# Altium PCB STSPIN 4 IN 1 ESC.PcbDoc (part 1 of 2)
Units mm, origin at the board's own origin, x right, y up, seen from the top; angles counter-clockwise.
Board outline 46 x 52 mm, 4 copper layers (Top Layer, Layer 1, Layer 2, Bottom Layer), stack 0.603 mm thick; 147 components, 145 nets, 686 pads, 138 vias.
Unrouted connection lines stored in the file: 240.
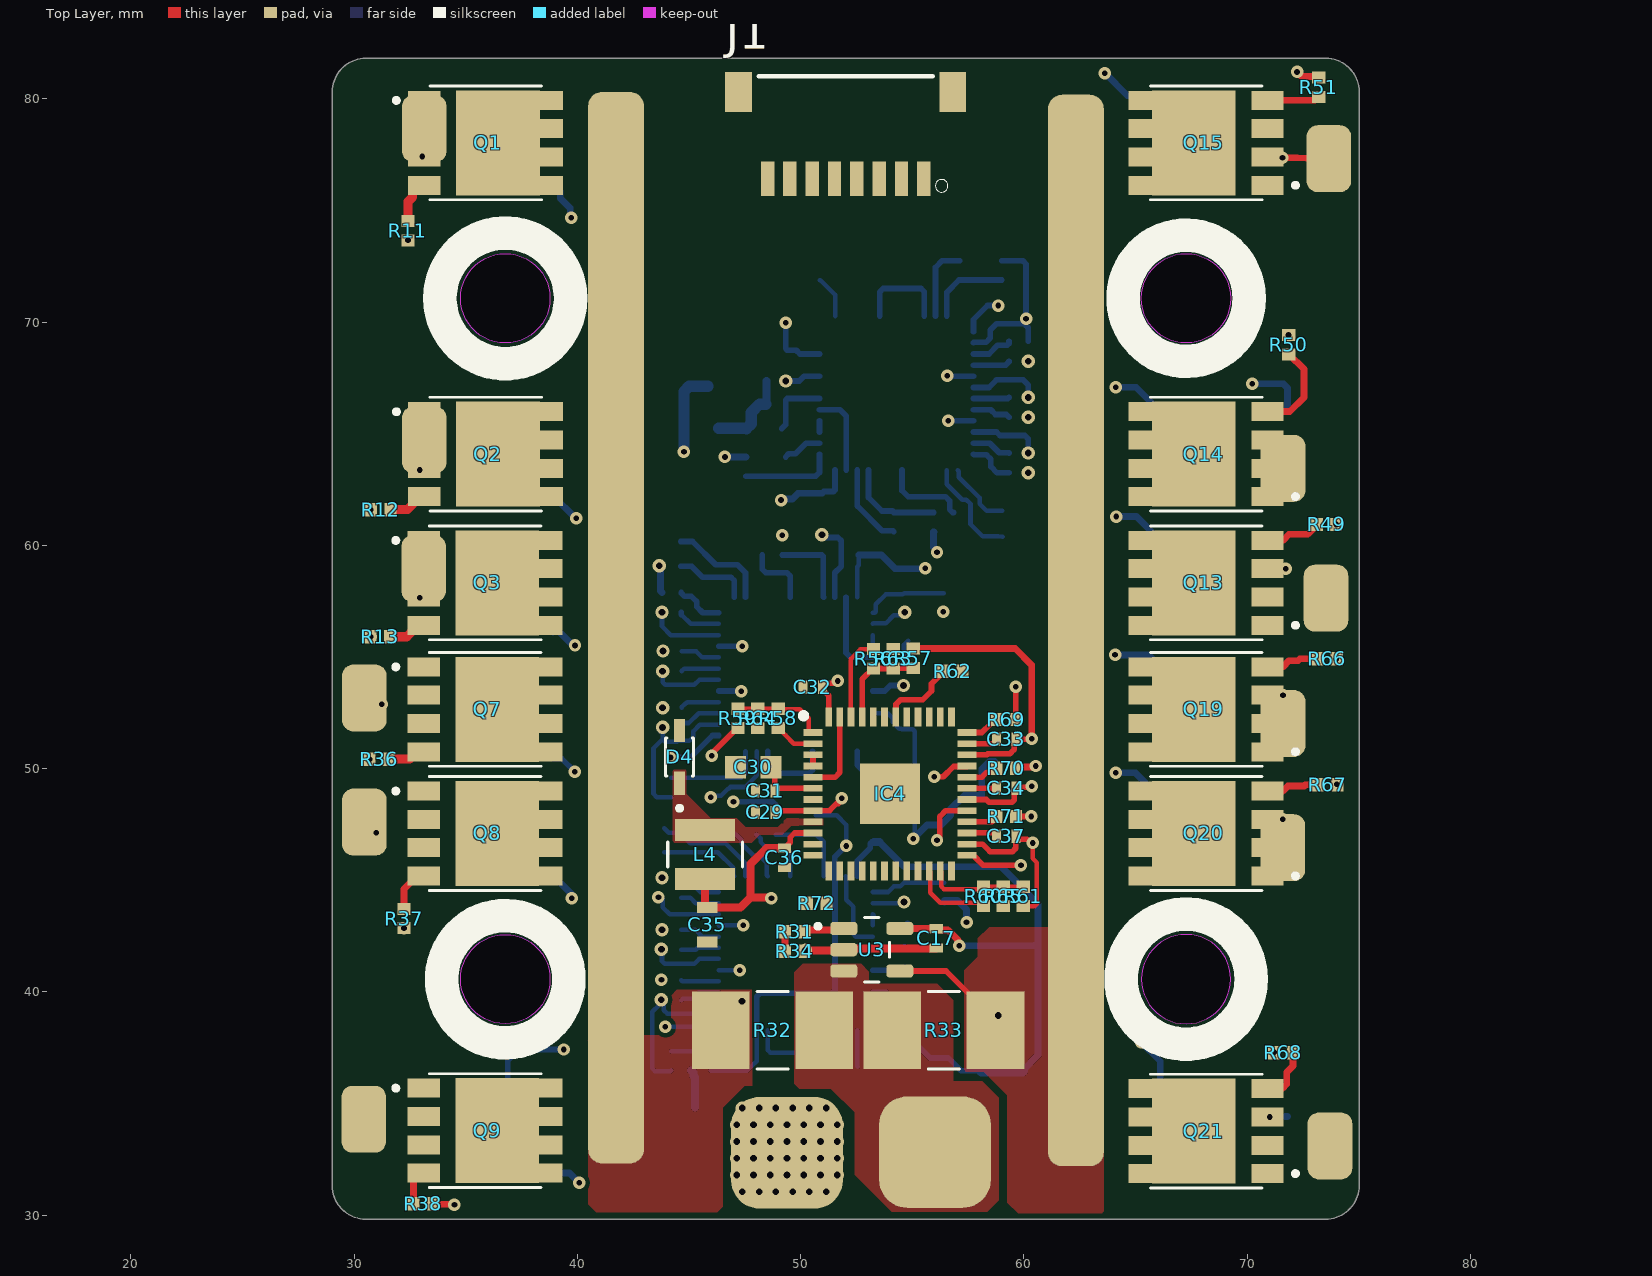
[diagram p0: Top Layer view]
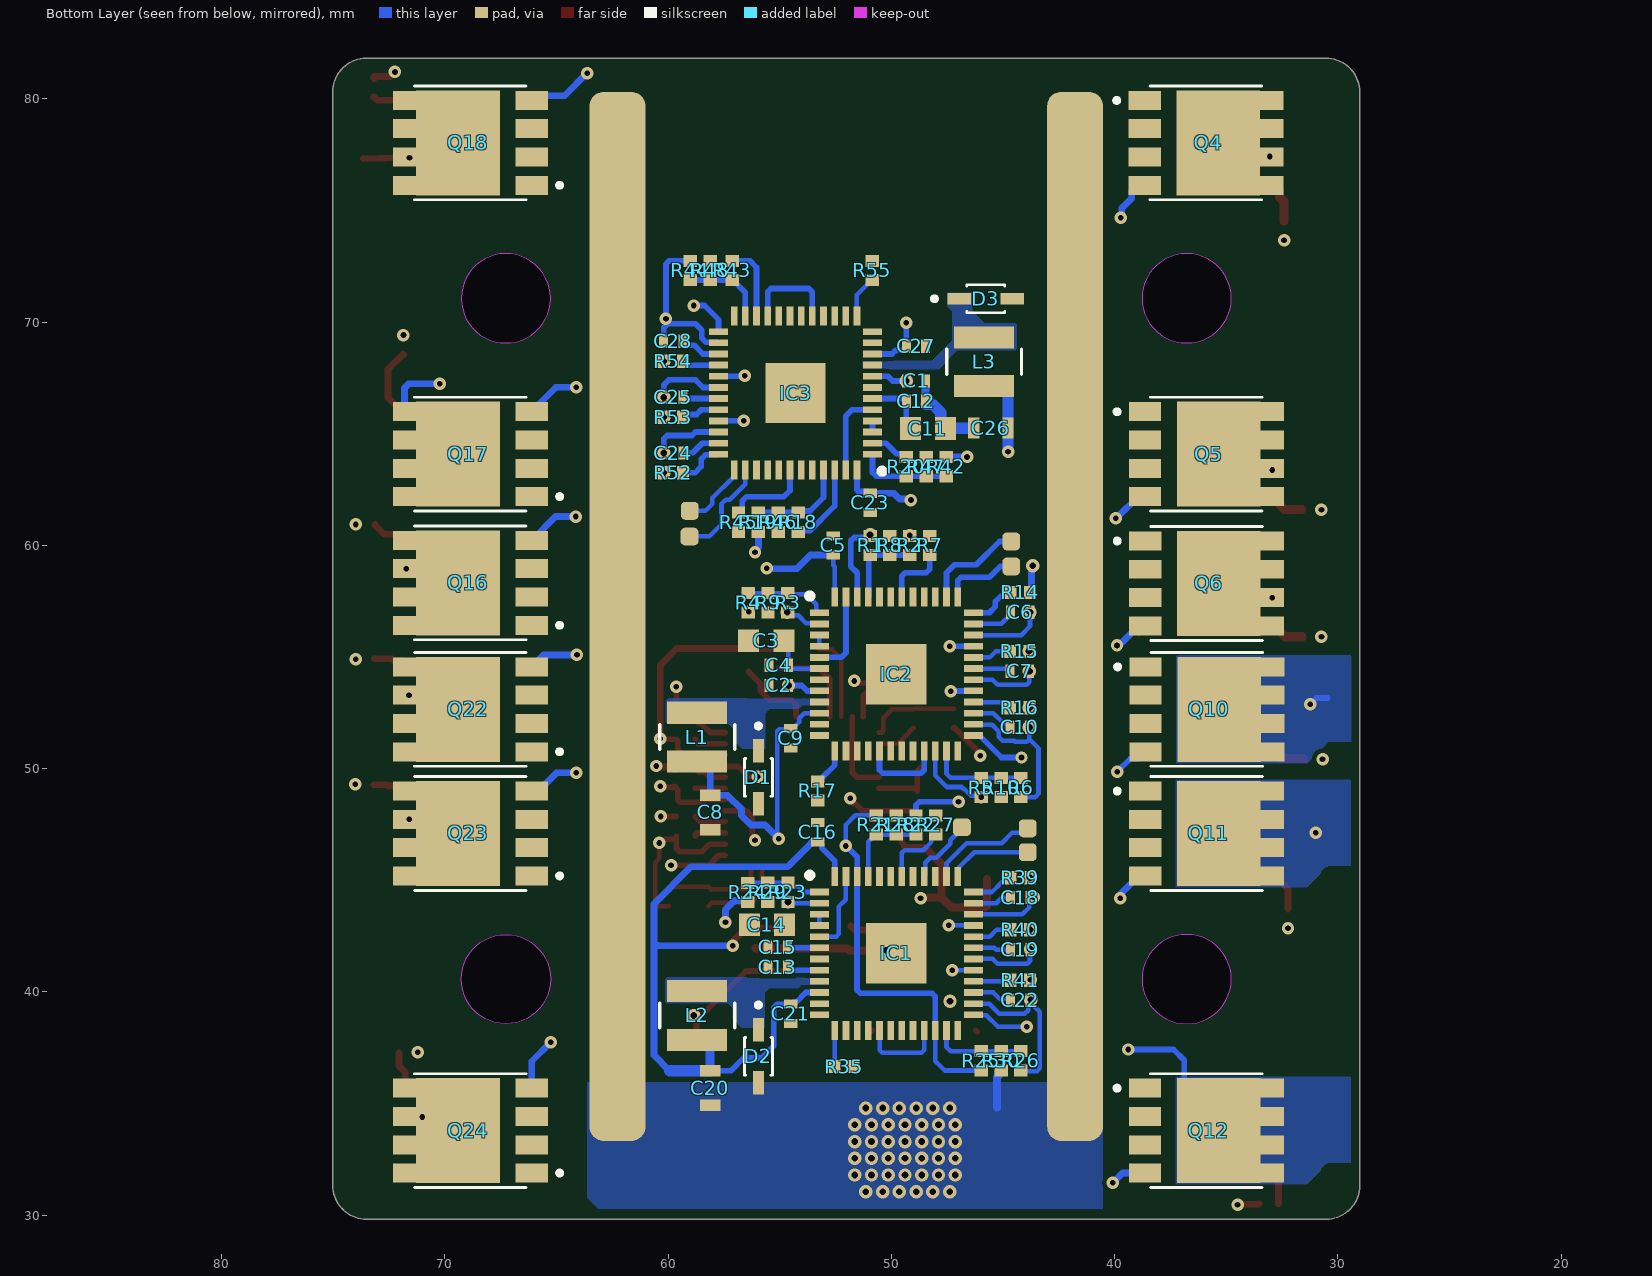
[diagram p1: Bottom Layer view, seen from below]
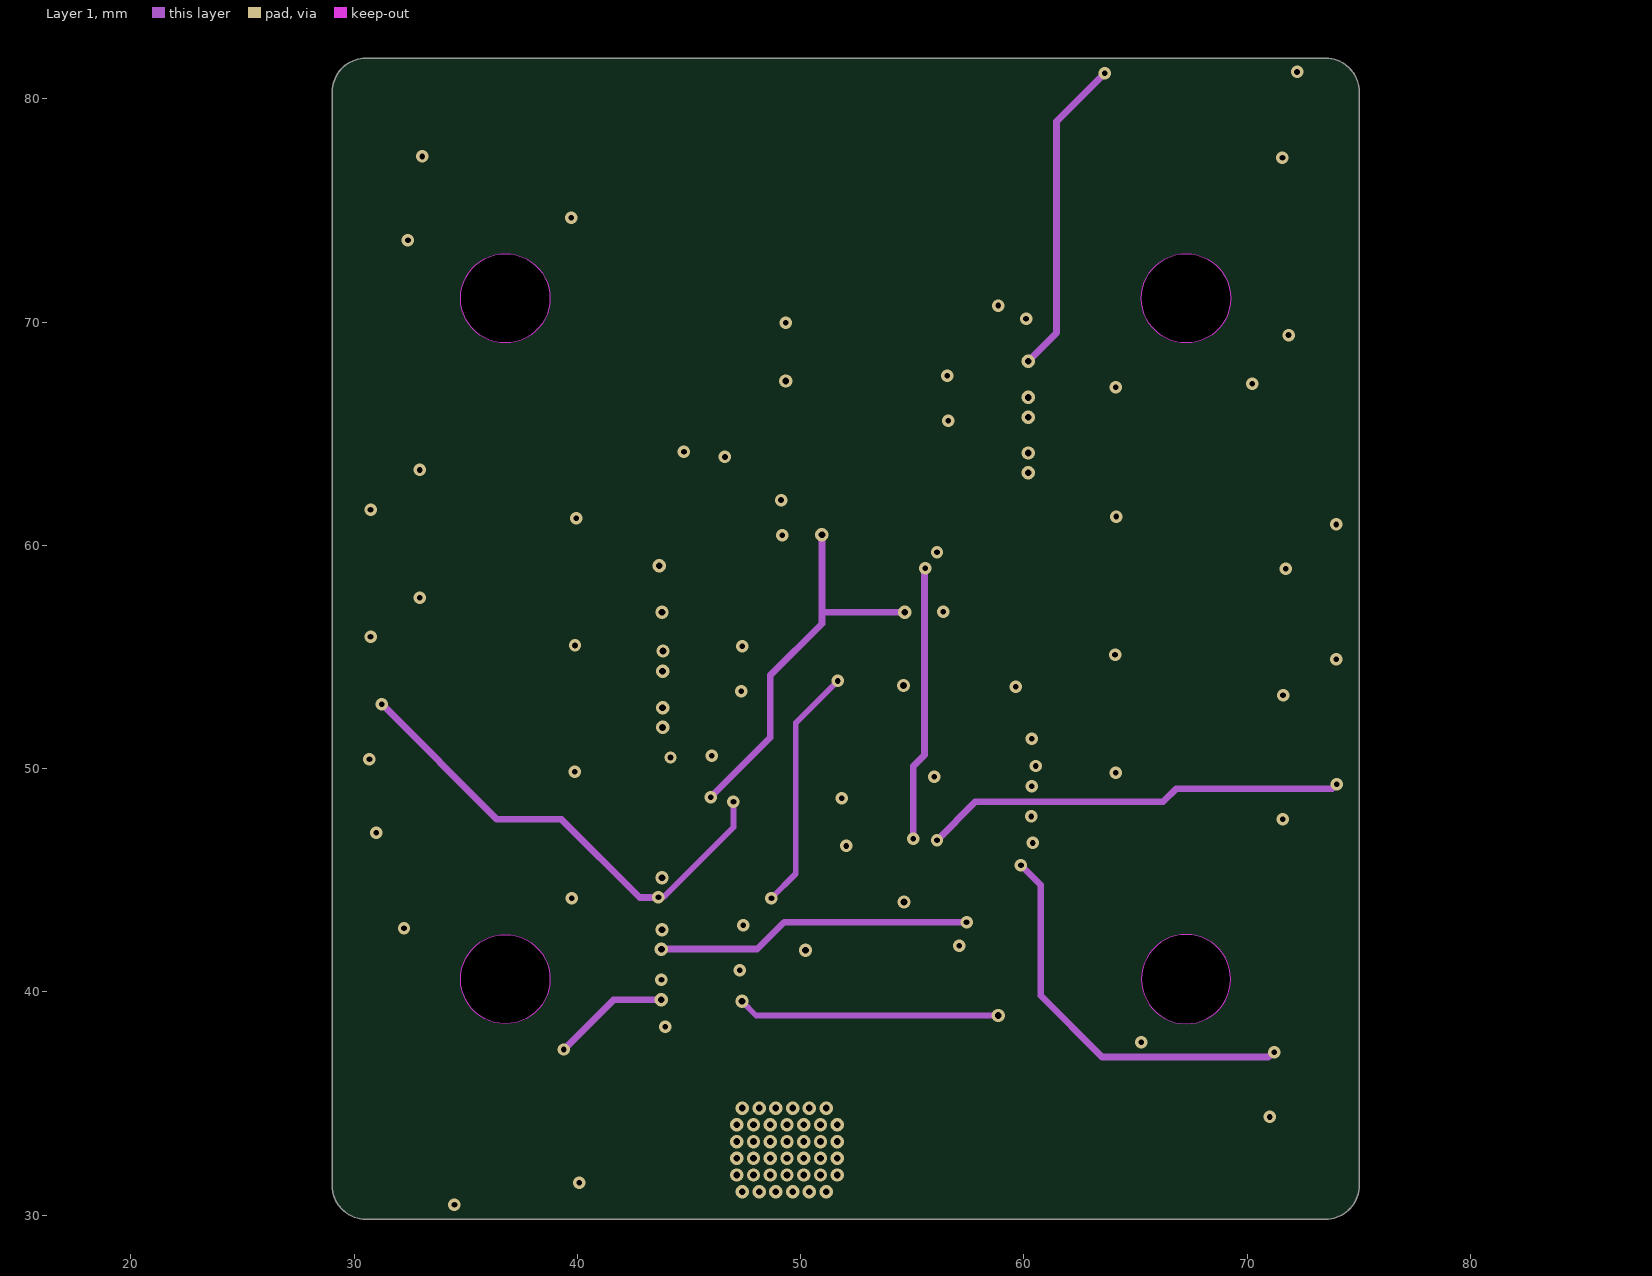
[diagram p2: Layer 1]
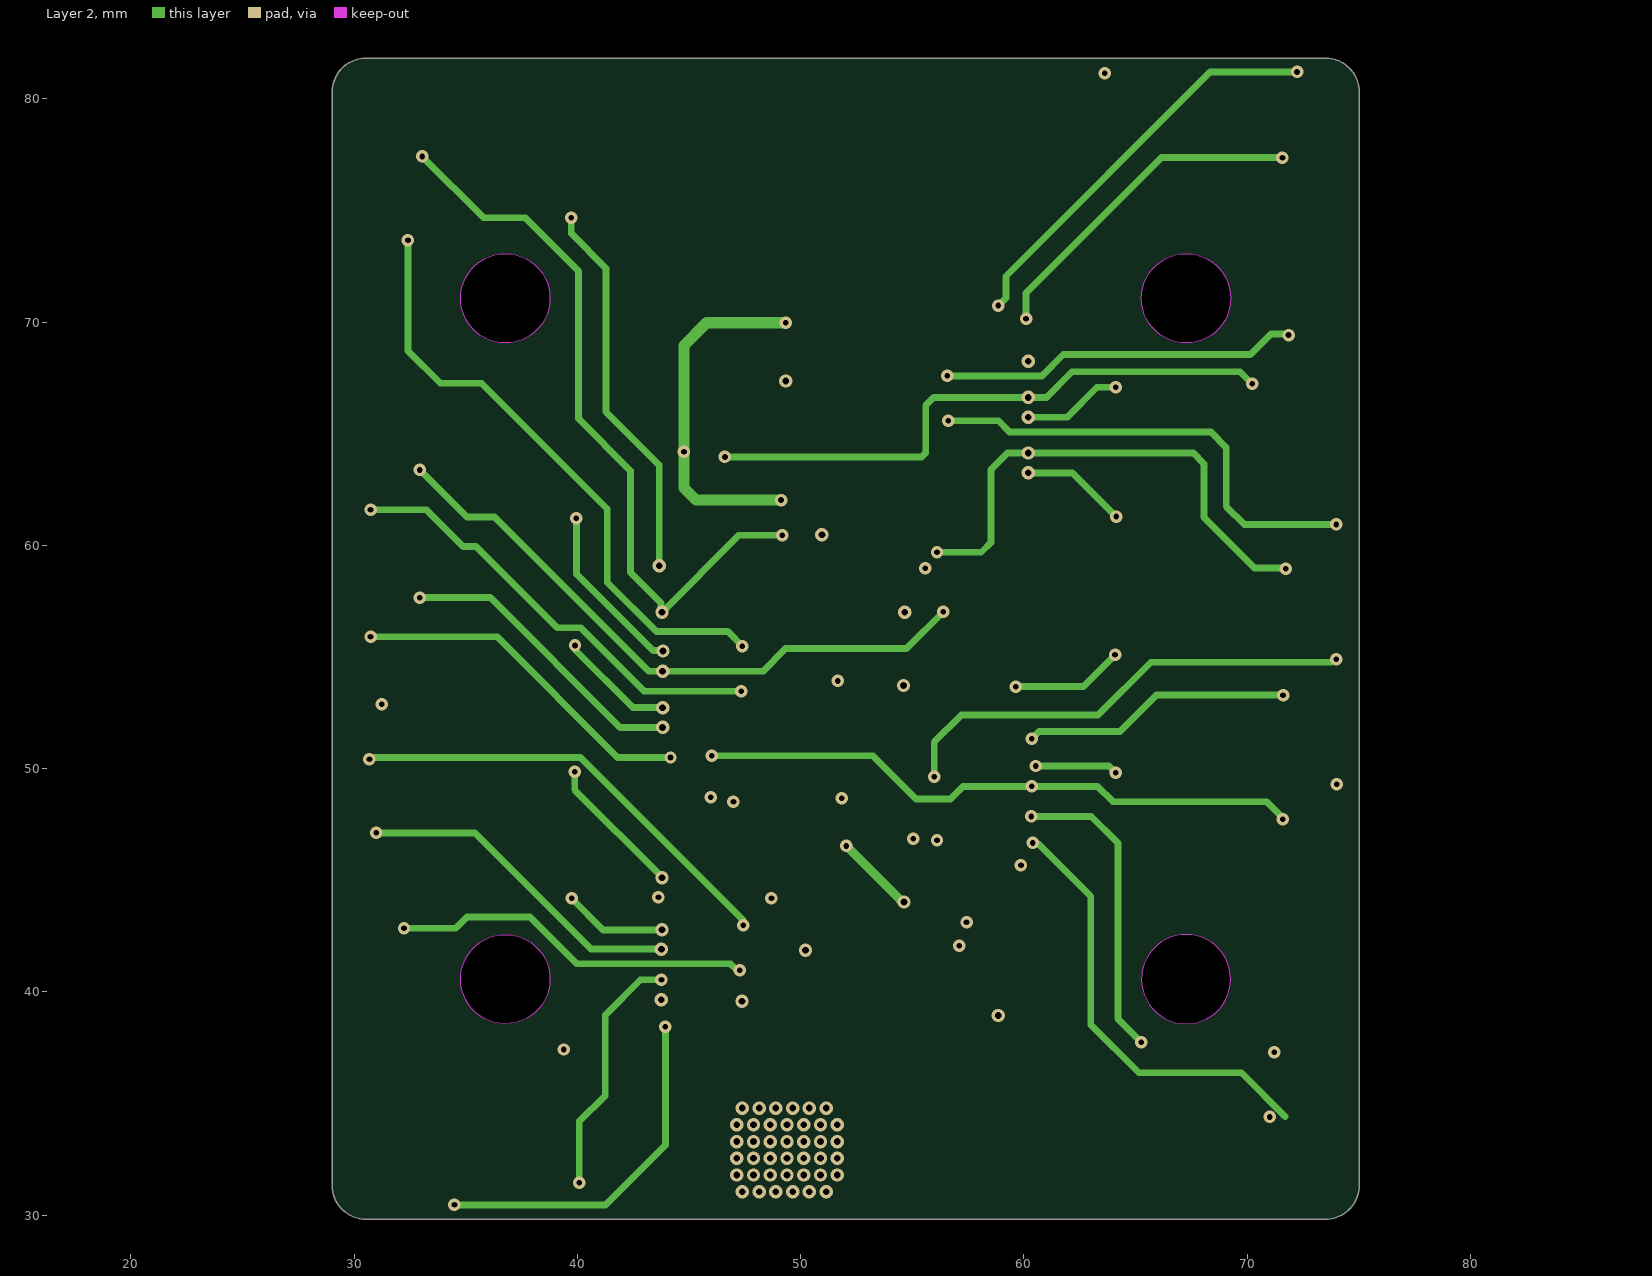
[diagram p3: Layer 2]
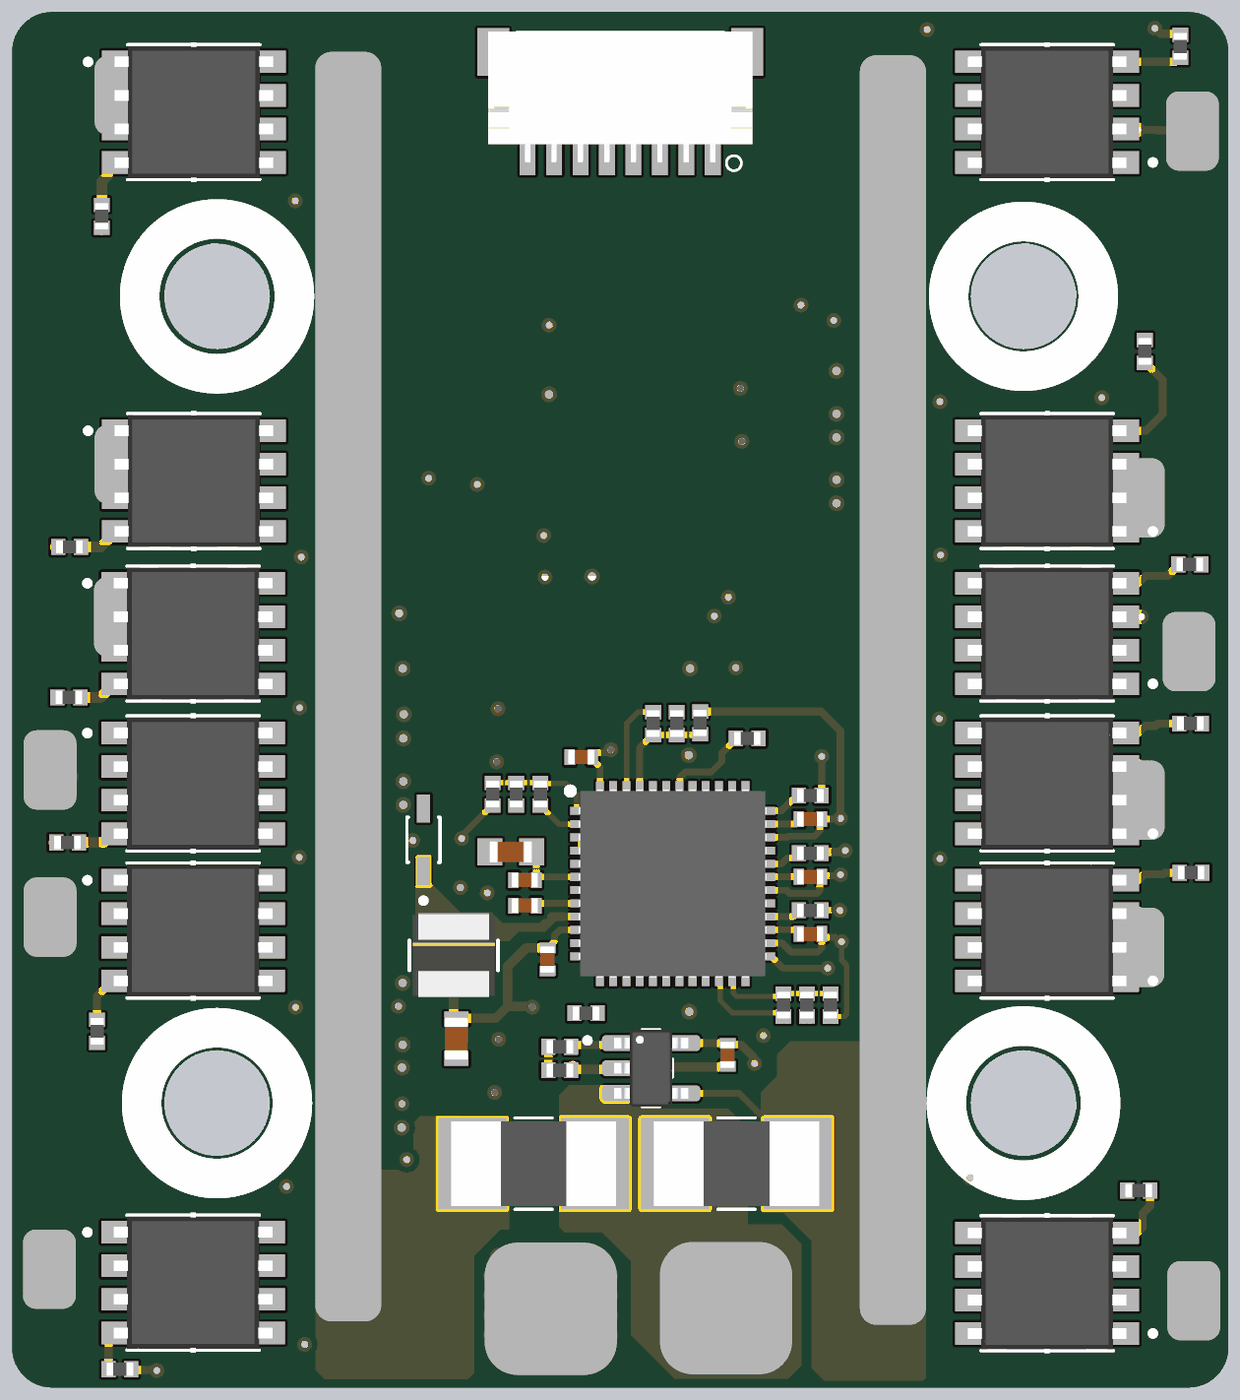
[diagram p4: 3D render of the assembled board from above, using the file's embedded part models]
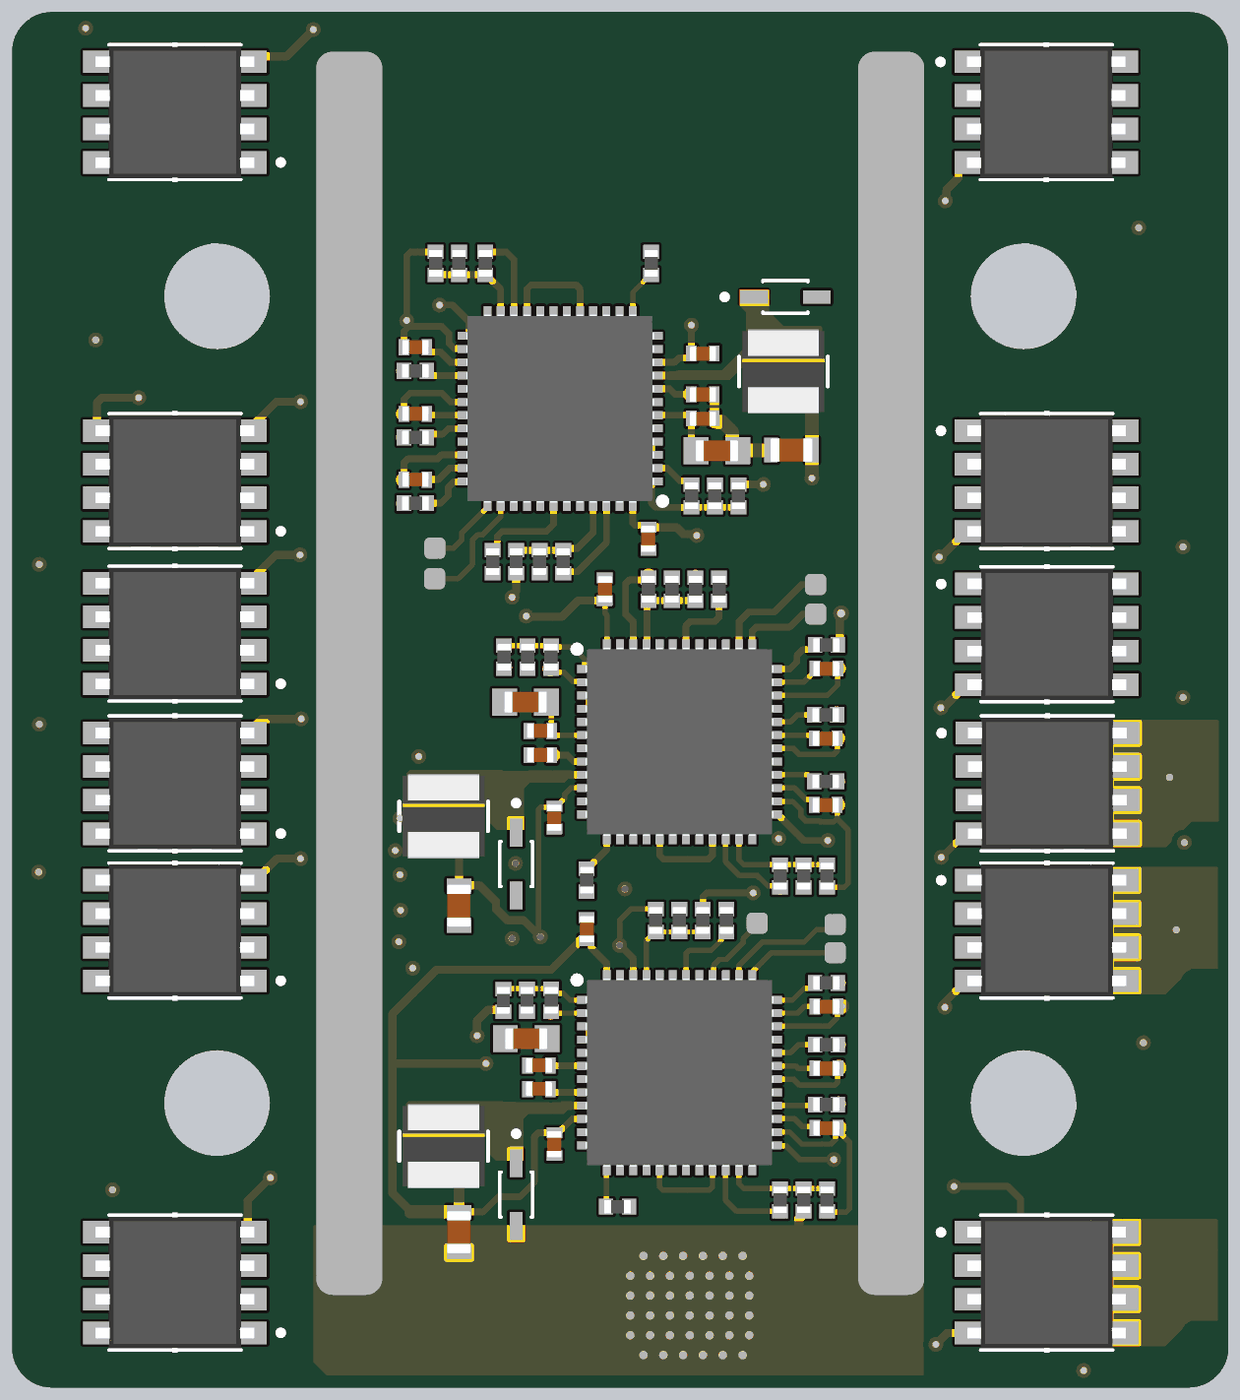
[diagram p5: 3D render of the assembled board from below, using the file's embedded part models]

## Layer stack, top to bottom
Top Solder: solder mask 0.0102, Solder Resist, Dk 3.5
Top Layer: signal copper 0.0356
Dielectric 2: prepreg 0.0711, PP-006, Dk 4.1
Layer 1: signal copper 0.035
Dielectric 1: dielectric 0.32, FR-4, Dk 4.8
Layer 2: signal copper 0.035
Dielectric 3: prepreg 0.0711, PP-006, Dk 4.1
Bottom Layer: signal copper 0.0356
Bottom Solder: solder mask 0.0102, Solder Resist, Dk 3.5

## Board outline
30.519,29.816 cw(c30.519,31.316) 29.019,31.316 29.019,80.316 cw(c30.519,80.316) 30.519,81.816 73.519,81.816 cw(c73.519,80.316) 75.019,80.316 75.019,31.316 cw(c73.519,31.316) 73.519,29.816
cut-out: 36.769,38.566 cw(c36.769,40.566) 34.769,40.566 cw(c36.769,40.566) 36.769,42.566 cw(c36.769,40.566) 38.769,40.566 cw(c36.769,40.566)
cut-out: 65.269,40.566 ccw(c67.269,40.566) 67.269,38.566 ccw(c67.269,40.566) 69.269,40.566 ccw(c67.269,40.566) 67.269,42.566 ccw(c67.269,40.566)
cut-out: 36.769,69.066 cw(c36.769,71.066) 34.769,71.066 cw(c36.769,71.066) 36.769,73.066 cw(c36.769,71.066) 38.769,71.066 cw(c36.769,71.066)
cut-out: 67.269,69.066 cw(c67.269,71.066) 65.269,71.066 cw(c67.269,71.066) 67.269,73.066 cw(c67.269,71.066) 69.269,71.066 cw(c67.269,71.066)

## Design rules (kind name [scope] priority, off if disabled: settings)
Clearance [All] p1: gap=0.203 ignorepadtopadclearanceinfootprint=TRUE
PlaneClearance [All] p1: clearance=0.254
PlaneConnect [All] p1: planeconnectstyle=Direct reliefexpansion=0.508 reliefentries=4 reliefconductorwidth=0.254 reliefairgap=0.254
PolygonConnect [All] p1: connectstyle=Direct reliefconductorwidth=0.254 reliefentries=4 polygonreliefangle="90 Angle" airgapwidth=0.254
RoutingVias [All] p1: holewidth=0.3 width=0.6 viastyle="Through Hole" minholewidth=0.2 minwidth=0.4 maxholewidth=6.2 maxwidth=8
SolderMaskExpansion [All] p1: expansion=0.102 istentingtop=FALSE
Width [All] p1: maxlimit=10.16 minlimit=0.203 preferedwidth=0.254
28 further rules are at their usual default settings.

## Classes and differential pairs
component class "STSPIN32F0A ESC5": C29 C30 C31 C32 C33 C34 C35 C36 C37 D4 IC4 L4 Q19 Q20 Q21 Q22 Q23 Q24 R56 R57 R58 R59 R60 R61 R62 R63 R64 R65 R66 R67 R68 R69 R70 R71 R72
component class "STSPIN32F0A ESC4": C1 C11 C12 C23 C24 C25 C26 C27 C28 D3 IC3 L3 Q13 Q14 Q15 Q16 Q17 Q18 R18 R19 R20 R42 R43 R44 R45 R46 R47 R48 R49 R50 R51 R52 R53 R54 R55
component class "STSPIN32F0A ESC3": C2 C3 C4 C5 C6 C7 C8 C9 C10 D1 IC2 J1 L1 Q1 Q2 Q3 Q4 Q5 Q6 R1 R2 R3 R4 R5 R6 R7 R8 R9 R10 R11 R12 R13 R14 R15 R16 R17
component class "STSPIN32F0A ESC2": C13 C14 C15 C16 C17 C18 C19 C20 C21 C22 D2 IC1 L2 Q7 Q8 Q9 Q10 Q11 Q12 R21 R22 R23 R24 R25 R26 R27 R28 R29 R30 R31 R32 R33 R34 R35 R36 R37 R38 R39 R40 R41 U3

## Components (designator, comment, footprint, x,y, rotation, side; value= is the part's Value field where it differs from the comment)
C1 "0.1uF" CAPC1005X55N 48.895,67.361 r0 bottom
C2 "0.1uF" CAPC1005X55N 55.042,53.721 r180 bottom
C3 "10uF" CAPC1608X100N 55.601,55.728 r180 bottom
C4 "0.1uF" CAPC1005X55N 55.042,54.635 r180 bottom
C5 "0.1uF" CAPC1005X55N 52.603,59.995 r270 bottom
C6 "680nF" CAPC1005X55N 44.221,56.998 r0 bottom
C7 "680nF" CAPC1005X55N 44.247,54.356 r0 bottom
C8 "47uF" CAPC1608X90N 58.115,48.031 r90 bottom
C9 "0.1uF" CAPC1005X55N 54.508,51.359 r90 bottom
C10 "680nF" CAPC1005X55N 44.247,51.841 r0 bottom
C11 "10uF" CAPC1608X100N 48.362,65.227 r0 bottom
C12 "0.1uF" CAPC1005X55N 48.895,66.446 r0 bottom
C13 "0.1uF" CAPC1005X55N 55.093,41.097 r180 bottom
C14 "10uF" CAPC1608X100N 55.575,43.002 r180 bottom
C15 "0.1uF" CAPC1005X55N 55.093,41.986 r180 bottom
C16 "0.1uF" CAPC1005X55N 53.289,47.142 r270 bottom
C17 "0.1uF" CAPC1005X55N 56.083,42.393 r90 top
C18 "680nF" CAPC1005X55N 44.221,44.221 r0 bottom
C19 "680nF" CAPC1005X55N 44.221,41.885 r0 bottom
C20 "47uF" CAPC1608X90N 58.115,35.687 r90 bottom
C21 "0.1uF" CAPC1005X55N 54.508,39.014 r90 bottom
C22 "680nF" CAPC1005X55N 44.221,39.624 r0 bottom
C23 "0.1uF" CAPC1005X55N 50.952,61.9 r90 bottom
C24 "680nF" CAPC1005X55N 59.766,64.135 r180 bottom
C25 "680nF" CAPC1005X55N 59.766,66.624 r180 bottom
C26 "47uF" CAPC1608X90N 45.542,65.253 r180 bottom
C27 "0.1uF" CAPC1005X55N 48.895,68.91 r0 bottom
C28 "680nF" CAPC1005X55N 59.766,69.139 r180 bottom
C29 "0.1uF" CAPC1005X55N 48.412,48.031 r0 top
C30 "10uF" CAPC1608X100N 47.879,50.063 r0 top
C31 "0.1uF" CAPC1005X55N 48.412,48.997 r0 top
C32 "0.1uF" CAPC1005X55N 50.546,53.645 r0 top
C33 "680nF" CAPC1005X55N 59.207,51.308 r180 top
C34 "680nF" CAPC1005X55N 59.207,49.124 r180 top
C35 "47uF" CAPC1608X90N 45.822,43.002 r90 top
C36 "0.1uF" CAPC1005X55N 49.276,45.999 r90 top
C37 "680nF" CAPC1005X55N 59.207,46.965 r180 top
D1 "B5819WS-TP" SOD2512X115N 55.956,49.606 r270 bottom
D2 "B5819WS-TP" SOD2512X115N 55.956,37.109 r270 bottom
D3 "B5819WS-TP" SOD2512X115N 45.771,71.044 r180 bottom
D4 "B5819WS-TP" SOD2512X115N 44.577,50.521 r90 top
IC1 "STSPIN32F0ATR" QFN50P700X700X100-49N-D 49.78,41.72 r180 bottom
IC2 "STSPIN32F0ATR" QFN50P700X700X100-49N-D 49.78,54.229 r180 bottom
IC3 "STSPIN32F0ATR" QFN50P700X700X100-49N-D 54.292,66.823 r0 bottom
IC4 "STSPIN32F0ATR" QFN50P700X700X100-49N-D 54.004,48.865 r0 top
J1 "SM08B-SRSS-TB(LF)(SN)" JST_SM08B-SRSS-TB(LF)(SN) 52.018,81.204 r180 top locked
L1 "22uH" IND_BOURNS_SRN3015 58.699,51.41 r270 bottom
L2 "22uH" IND_BOURNS_SRN3015 58.699,38.938 r270 bottom
L3 "22uH" IND_BOURNS_SRN3015 45.847,68.224 r270 bottom
L4 "22uH" IND_BOURNS_SRN3015 45.72,46.152 r270 top
Q1 "TPHR8504PL,L1Q" TRANS_TPHR8504PL,L1Q 35.89,78.029 r0 top
Q2 "TPHR8504PL,L1Q" TRANS_TPHR8504PL,L1Q 35.89,64.084 r0 top
Q3 "TPHR8504PL,L1Q" TRANS_TPHR8504PL,L1Q 35.865,58.318 r0 top
Q4 "TPHR8504PL,L1Q" TRANS_TPHR8504PL,L1Q 35.907,78.029 r180 bottom
Q5 "TPHR8504PL,L1Q" TRANS_TPHR8504PL,L1Q 35.89,64.084 r180 bottom
Q6 "TPHR8504PL,L1Q" TRANS_TPHR8504PL,L1Q 35.881,58.293 r180 bottom
Q7 "TPHR8504PL,L1Q" TRANS_TPHR8504PL,L1Q 35.865,52.654 r0 top
Q8 "TPHR8504PL,L1Q" TRANS_TPHR8504PL,L1Q 35.865,47.092 r0 top
Q9 "TPHR8504PL,L1Q" TRANS_TPHR8504PL,L1Q 35.865,33.782 r0 top
Q10 "TPHR8504PL,L1Q" TRANS_TPHR8504PL,L1Q 35.865,52.654 r180 bottom
Q11 "TPHR8504PL,L1Q" TRANS_TPHR8504PL,L1Q 35.881,47.092 r180 bottom
Q12 "TPHR8504PL,L1Q" TRANS_TPHR8504PL,L1Q 35.89,33.782 r180 bottom
Q13 "TPHR8504PL,L1Q" TRANS_TPHR8504PL,L1Q 68.165,58.318 r180 top
Q14 "TPHR8504PL,L1Q" TRANS_TPHR8504PL,L1Q 68.165,64.084 r180 top
Q15 "TPHR8504PL,L1Q" TRANS_TPHR8504PL,L1Q 68.165,78.029 r180 top
Q16 "TPHR8504PL,L1Q" TRANS_TPHR8504PL,L1Q 68.859,58.318 r0 bottom
Q17 "TPHR8504PL,L1Q" TRANS_TPHR8504PL,L1Q 68.859,64.084 r0 bottom
Q18 "TPHR8504PL,L1Q" TRANS_TPHR8504PL,L1Q 68.859,78.029 r0 bottom
Q19 "TPHR8504PL,L1Q" TRANS_TPHR8504PL,L1Q 68.165,52.654 r180 top
Q20 "TPHR8504PL,L1Q" TRANS_TPHR8504PL,L1Q 68.165,47.092 r180 top
Q21 "TPHR8504PL,L1Q" TRANS_TPHR8504PL,L1Q 68.165,33.757 r180 top
Q22 "TPHR8504PL,L1Q" TRANS_TPHR8504PL,L1Q 68.859,52.654 r0 bottom
Q23 "TPHR8504PL,L1Q" TRANS_TPHR8504PL,L1Q 68.859,47.092 r0 bottom
Q24 "TPHR8504PL,L1Q" TRANS_TPHR8504PL,L1Q 68.859,33.782 r0 bottom
R1 "10K" RESC1005X37N 50.952,59.995 r90 bottom
R2 "10K" RESC1005X37N 49.174,59.995 r270 bottom
R3 "10K" RESC1005X37N 54.635,57.429 r270 bottom
R4 "10K" RESC1005X37N 56.413,57.429 r90 bottom
R5 "10K" RESC1005X37N 45.974,49.149 r270 bottom
R6 "10K" RESC1005X37N 44.196,49.149 r90 bottom
R7 "10K" RESC1005X37N 48.285,59.995 r270 bottom
R8 "1K" RESC1005X37N 50.063,59.995 r90 bottom
R9 "1K" RESC1005X37N 55.524,57.429 r270 bottom
R10 "1K" RESC1005X37N 45.085,49.149 r270 bottom
R11 "22R" RESC1005X37N 32.41,74.092 r270 top
R12 "22R" RESC1005X37N 31.191,61.595 r180 top
R13 "22R" RESC1005X37N 31.166,55.905 r180 top
R14 "22R" RESC1005X37N 44.221,57.887 r0 bottom
R15 "22R" RESC1005X37N 44.247,55.245 r0 bottom
R16 "22R" RESC1005X37N 44.247,52.73 r0 bottom
R17 "1K" RESC1005X37N 53.289,48.997 r90 bottom
R18 "10K" RESC1005X37N 54.178,61.036 r270 bottom
R19 "10K" RESC1005X37N 55.956,61.036 r90 bottom
R20 "10K" RESC1005X37N 49.327,63.525 r90 bottom
R21 "10K" RESC1005X37N 50.673,47.473 r90 bottom
R22 "10K" RESC1005X37N 48.895,47.473 r270 bottom
R23 "10K" RESC1005X37N 54.63,44.454 r270 bottom
R24 "10K" RESC1005X37N 56.439,44.45 r90 bottom
R25 "10K" RESC1005X37N 45.974,36.906 r270 bottom
R26 "10K" RESC1005X37N 44.196,36.906 r90 bottom
R27 "10K" RESC1005X37N 48.006,47.473 r270 bottom
R28 "1K" RESC1005X37N 49.784,47.473 r90 bottom
R29 "1K" RESC1005X37N 55.545,44.454 r270 bottom
R30 "1K" RESC1005X37N 45.085,36.906 r270 bottom
R31 "1K" RESC1005X37N 49.733,42.697 r180 top
R32 "CSSH2512JTL500" RESC6232X104N 48.743,38.278 r180 top
R33 "CSSH2512JTL500" RESC6232X104N 56.413,38.278 r0 top
R34 "1K" RESC1005X37N 49.733,41.808 r0 top
R35 "1K" RESC1005X37N 52.121,36.652 r0 bottom
R36 "22R" RESC1005X37N 31.115,50.419 r180 top
R37 "22R" RESC1005X37N 32.233,43.282 r270 top
R38 "22R" RESC1005X37N 33.096,30.505 r0 top
R39 "22R" RESC1005X37N 44.221,45.11 r0 bottom
R40 "22R" RESC1005X37N 44.221,42.774 r0 bottom
R41 "22R" RESC1005X37N 44.221,40.513 r0 bottom
R42 "10K" RESC1005X37N 47.549,63.525 r270 bottom
R43 "10K" RESC1005X37N 57.125,72.314 r90 bottom
R44 "10K" RESC1005X37N 59.004,72.314 r270 bottom
R45 "10K" RESC1005X37N 56.845,61.036 r90 bottom
R46 "1K" RESC1005X37N 55.067,61.036 r270 bottom
R47 "1K" RESC1005X37N 48.438,63.525 r90 bottom
R48 "1K" RESC1005X37N 58.115,72.314 r90 bottom
R49 "22R" RESC1005X37N 73.558,60.935 r0 top
R50 "22R" RESC1005X37N 71.857,68.986 r90 top
R51 "22R" RESC1005X37N 73.203,80.518 r90 top
R52 "22R" RESC1005X37N 59.766,63.246 r180 bottom
R53 "22R" RESC1005X37N 59.766,65.735 r180 bottom
R54 "22R" RESC1005X37N 59.766,68.25 r180 bottom
R55 "1K" RESC1005X37N 50.851,72.314 r270 bottom
R56 "10K" RESC1005X37N 53.264,54.915 r90 top
R57 "10K" RESC1005X37N 55.042,54.94 r270 top
R58 "10K" RESC1005X37N 48.997,52.248 r270 top
R59 "10K" RESC1005X37N 47.193,52.248 r90 top
R60 "10K" RESC1005X37N 58.191,44.272 r270 top
R61 "10K" RESC1005X37N 59.969,44.272 r90 top
R62 "10K" RESC1005X37N 56.82,54.356 r180 top
R63 "1K" RESC1005X37N 54.153,54.915 r90 top
R64 "1K" RESC1005X37N 48.082,52.248 r270 top
R65 "1K" RESC1005X37N 59.08,44.272 r270 top
R66 "22R" RESC1005X37N 73.584,54.915 r0 top
R67 "22R" RESC1005X37N 73.609,49.276 r0 top
R68 "22R" RESC1005X37N 71.628,37.262 r180 top
R69 "22R" RESC1005X37N 59.207,52.197 r180 top
R70 "22R" RESC1005X37N 59.207,50.013 r180 top
R71 "22R" RESC1005X37N 59.207,47.854 r180 top
R72 "1K" RESC1005X37N 50.724,43.967 r0 top
U3 "INA169NA/3K" SOT95P280X145-5N 53.188,41.885 r0 top

## Footprints (in the part's own frame and the unit in brackets; to place one, negate y for a bottom-side part, rotate by r counter-clockwise, add the part's x,y. Pads: shape width x height; smd on the part's side, far side on the other; paste and mask are expansions set on the pad)
CAPC1005X55N [mm]
  rect 0.406x0.6 smd mask+0.102: 1(-0.432,0) 2(0.432,0)
  body extent -0.5,-0.27 0.5,0.28, height 0.5
CAPC1608X90N [mm]
  rect 0.508x0.93 smd mask+0.102: 1(-0.77,0) 2(0.77,0)
  body extent -0.8,-0.44 0.8,0.46, height 0.81
CAPC1608X100N [mm]
  rect 0.94x1.02 smd mask+0.102: 1(-0.79,0) 2(0.79,0)
  body extent -0.8,-0.4 0.8,0.4, height 0.45
IND_BOURNS_SRN3015 [mil]
  rect 39x106 smd paste+0 mask+0: 1(-43,0) 2(43,0)
  silkscreen extent -22,-66 22,66, body extent -61,-61 61,61, height 59
JST_SM08B-SRSS-TB(LF)(SN) [mm]
  rect 0.6x1.55 smd mask+0.102: 1(-3.5,4.775) 2(-2.5,4.775) 3(-1.5,4.775) 4(-0.5,4.775) 5(0.5,4.775) 6(1.5,4.775) 7(2.5,4.775) 8(3.5,4.775)
  rect 1.2x1.8 smd mask+0.102: P1(-4.8,0.9) P2(4.8,0.9)
  silkscreen extent -4.58,0.2 3.9,5.38, body extent -5,0.13 5,5.08, height 2.97
QFN50P700X700X100-49N-D [mm]
  rect 0.85x0.3 smd mask+0.102: 1(-3.45,2.75) 2(-3.45,2.25) 3(-3.45,1.75) 4(-3.45,1.25) 5(-3.45,0.75) 6(-3.45,0.25) 7(-3.45,-0.25) 8(-3.45,-0.75) 9(-3.45,-1.25) 10(-3.45,-1.75) 11(-3.45,-2.25) 12(-3.45,-2.75) 25(3.45,-2.75) 26(3.45,-2.25) 27(3.45,-1.75) 28(3.45,-1.25) 29(3.45,-0.75) 30(3.45,-0.25) 31(3.45,0.25) 32(3.45,0.75) 33(3.45,1.25) 34(3.45,1.75) 35(3.45,2.25) 36(3.45,2.75)
  rect 0.3x0.85 smd mask+0.102: 13(-2.75,-3.45) 14(-2.25,-3.45) 15(-1.75,-3.45) 16(-1.25,-3.45) 17(-0.75,-3.45) 18(-0.25,-3.45) 19(0.25,-3.45) 20(0.75,-3.45) 21(1.25,-3.45) 22(1.75,-3.45) 23(2.25,-3.45) 24(2.75,-3.45) 37(2.75,3.45) 38(2.25,3.45) 39(1.75,3.45) 40(1.25,3.45) 41(0.75,3.45) 42(0.25,3.45) 43(-0.25,3.45) 44(-0.75,3.45) 45(-1.25,3.45) 46(-1.75,3.45) 47(-2.25,3.45) 48(-2.75,3.45)
  rect 2.7x2.7 smd mask+0.102: 49(0,0)
  silkscreen extent -4,3.38 -3.75,3.62, body extent -3.55,-3.55 3.55,3.55, height 1
RESC1005X37N [mm]
  rect 0.54x0.6 smd mask+0.102: 1(-0.432,0) 2(0.432,0)
  body extent -0.5,-0.25 0.5,0.25, height 0.37
RESC6232X104N [mm]
  rect 2.58x3.46 smd mask+0.102: 1(-2.316,0) 2(2.316,0)
  silkscreen extent -0.7,-1.73 0.7,1.73, body extent -3.13,-1.6 3.13,1.6, height 1.04
SOD2512X115N [mm]
  rect 1.05x0.5 smd mask+0.102: A(1.185,0) C(-1.185,0)
  silkscreen extent -2.4,-0.63 0.85,0.63
SOT95P280X145-5N [mm]
  rrect50% 1.21x0.59 smd mask+0.102: 1(-1.255,0.95) 2(-1.255,0) 3(-1.255,-0.95) 4(1.255,-0.95) 5(1.255,0.95)
  silkscreen extent -2.51,-1.45 0.8,1.45, body extent -1.4,-1.45 1.4,1.45, height 1.45
TRANS_TPHR8504PL,L1Q [mm]
  rect 1.45x0.85 smd mask+0.102: 1(-2.75,1.905) 2(-2.75,0.635) 3(-2.75,-0.635) 4(-2.75,-1.905)
  rect 1.05x0.85 smd mask+0.102: 5(2.95,-1.905) 6(2.95,-0.635) 7(2.95,0.635) 8(2.95,1.905)
  rect 3.75x4.7 smd paste-3 mask+0.102: 9(0.55,0)
  silkscreen extent -4.1,-2.55 2.5,2.55, body extent -3,-2.65 3,2.65, height 1

## Part data
C1 C2 C4 C5 C6 C7 C9 C10 C12 C13 C15 C16 C17 C18 C19 C21 C22 C23 C24 C25 C27 C28 C29 C31 C32 C33 C34 C36 C37: library part GRM1555C1H222JA01D, Package=None, Availability=Unavailable, MP=GRM1555C1H222JA01D, Price=None
C3 C11 C14 C30: library part CL10F104ZB8NNNC, "Capacitor 0603 0.1uF Y5V", Package=None, Availability=Unavailable, MF="{'manufacturer': u'Samsung'}", MP=CL10F104ZB8NNNC, Price=None
C8 C20 C26 C35: library part GRM188R71E224JA88D, "SMD Capacitor X7R(EIA) with Capacitance: 0.22uF Tol. 5%. Rated Voltage: 25Vdc", Package=None, Availability=Unavailable, MP=GRM188R71E224JA88D, Price=None
D1 D2 D3 D4 R32 R33 U3: Package=None, Availability=Unavailable, Price=None
  D1 D2 D3 D4: MF="{'manufacturer': u'Micro Commercial Components'}", MP=B5819WS-TP
  R32 R33: MF="{'manufacturer': u'Stackpole Electronics Inc'}", MP=CSSH2512JTL500
  U3: MF="{'manufacturer': u'Texas Instruments'}", MP=INA169NA/3K
IC1 IC2 IC3 IC4: "Integrated Circuit", Manufacturer_Name=STMicroelectronics, Mouser Part Number=511-STSPIN32F0ATR, Arrow Part Number=STSPIN32F0ATR, Arrow Price/Stock=https://www.arrow.com/en/products/stspin32f0atr/stmicroelectronics, Datasheet Link=http://www.st.com/content/ccc/resource/technical/document/datasheet/group3/3d/88/0f/d1/3f/0c/49/80/DM00406030/files/DM00406030.pdf/jcr:content/translations/en.DM00406030.pdf, Height=1mm, Manufacturer_Part_Number=STSPIN32F0ATR, Mouser Price/Stock=https://www.mouser.co.uk/ProductDetail/STMicroelectronics/STSPIN32F0ATR?qs=1mbolxNpo8flc7yUpKWOVQ%3D%3D
J1: "SH Series 8 Position 1 mm Pitch Surface Mount Side Entry Shrouded Header", Package=None, Availability=Unavailable, MP=SM08B-SRSS-TB(LF)(SN), Price=None
L1 L2 L3 L4: library part SRN3015-220M, "No Description Available", MFR_NAME="Bourns Electronics", COPYRIGHT="Copyright (C) 2022 Ultra Librarian. All rights reserved.", DIGI-KEY_PART_NUMBER_1=SRN3015-220MCT-ND, DIGI-KEY_PART_NUMBER_2=SRN3015-220MDKR-ND, DIGI-KEY_PART_NUMBER_3=SRN3015-220MTR-ND, Manufacturer_Part_Number=SRN3015-220M, RefDes=RefDes, Type=DEV
Q1 Q2 Q3 Q4 Q5 Q6 Q7 Q8 Q9 Q10 Q11 Q12 Q13 Q14 Q15 Q16 Q17 Q18 Q19 Q20 Q21 Q22 Q23 Q24: "N-Channel 40V 150A (Tc) 1W (Ta), 170W (Tc) Surface Mount 8-SOP Advance (5x5)", Package="SOP-8 Toshiba", Availability=Unavailable, MF="Toshiba Semiconductor", MP=TPHR8504PL,L1Q, Price=None, SnapEDA_Link=https://www.snapeda.com/parts/TPHR8504PL,L1Q/Toshiba%20Semiconductor%20and%20Storage/view-part/604439/?ref=snap
R1 R2 R3 R4 R5 R6 R7 R8 R9 R10 R11 R12 R13 R14 R15 R16 R17 R18 R19 R20 R21 R22 R23 R24 R25 R26 R27 R28 R29 R30 R31 R34 R35 R36 R37 R38 R39 R40 R41 R42 R43 R44 R45 R46 R47 R48 R49 R50 R51 R52 R53 R54 R55 R56 R57 R58 R59 R60 R61 R62 R63 R64 R65 R66 R67 R68 R69 R70 R71 R72: library part RE0402BRE07330KL, Package=None, Availability=Unavailable, MF="{'manufacturer': u'Yageo'}", MP=RE0402BRE07330KL, Price=None

## Free pads (board coordinates)
  rrect50% 2x3 smd mask-0.076: 0.8MM(30.429,34.29) 0.8MM(30.455,47.6) 0.8MM(30.455,53.162) 0.8MM(33.115,58.953) 0.8MM(33.14,64.719) 0.8MM(33.14,78.664) 0.8MM(71.601,46.457) 0.8MM(71.609,52.019) 0.8MM(71.609,63.449) 0.8MM(73.533,57.633) 0.8MM(73.66,77.318) 0.8MM(73.711,33.096)
  rrect50% 0.8x0.8 smd far side mask-0.076: 0.8MM(43.891,46.253) 0.8MM(43.891,47.32) 0.8MM(44.628,59.055) 0.8MM(44.628,60.173) 0.8MM(46.838,47.371) 0.8MM(59.03,61.544) 0.8MM(59.042,60.392)
  rrect50% 2.5x48 smd mask-0.076: "BUS BAR"(41.732,56.312) "BUS BAR"(62.332,56.185)
  rrect50% 2.5x47 smd far side mask-0.076: "BUS BAR"(41.769,56.816) "BUS BAR"(62.269,56.816)
  rrect50% 5x5 smd mask-0.076: XT60(49.391,32.79) XT60(56.019,32.816)

## Via types
v1: diameter 0.559, hole 0.254, Top Layer to Bottom Layer, tented both sides, 75 vias
v2: diameter 0.6, hole 0.3, Top Layer to Bottom Layer, tented both sides, 63 vias

## Nets (pads, with @x,y where several pads share a name; then routed paths per layer and width w, separated by ;. In a path a pad name is that pad's centre, name@x,y a point inside that pad or via, vN(x,y) a via of type N, cw(c..) or ccw(c..) an arc to the next point about the centre after c; other vN are vias at no path point)
3V32: C16.2 C17.2 C20.2 C21.2 IC1.10 IC1.48 L2.2 U3.5 | length 35.8
  Top Layer w0.305: U3.5 54.448,42.83 56.078,42.83 56.134,42.774 56.591,42.774 57.051,42.314 57.051,42.111 v1(57.099,42.062)
  Bottom Layer w0.254: IC1.48 52.536,45.177 52.536,45.866 53.116,46.446 53.116,46.634 53.192,46.71 C16.2 ; IC1.10 53.233,39.967 53.832,39.967 54.277,39.523 54.432,39.523 C21.2 55.118,39.446 55.27,39.294 55.27,37.567 55.804,37.033 56.617,37.033 57.193,36.457 C20.2
  Bottom Layer w0.305: C16.2@53.532,46.711 54.638,45.605 58.967,45.605 60.637,43.934 60.637,42.062 ; v1(57.099,42.062) 60.434,42.062 60.447,42.075 60.624,42.075 60.637,42.062 ; 59.933,36.457 60.637,37.161 60.637,42.062
  Bottom Layer w0.356: C16.2 C16.2@53.532,46.711
  Bottom Layer w0.406: C20.2 58.115,37.554 58.407,37.846 L2.2
  Bottom Layer w0.508: C20.2 59.933,36.457
3V33: C5.2 C8.2 C9.2 IC2.10 IC2.48 L1.2 | length 30.6
  Layer 1 w0.305: v1(55.04,46.851) 55.04,50.087 55.554,50.601 55.554,58.958 v1(55.575,58.979)
  Bottom Layer w0.203: IC2.48 52.53,59.032 52.603,59.106 C5.2 ; IC2.10 53.896,52.479 54.119,52.257 54.119,52.084 54.412,51.791 C9.2 54.534,51.765 55.024,51.765 55.113,51.676 55.113,46.924 v1(55.04,46.851)
  Bottom Layer w0.305: C5.2 53.62,59.563 54.229,58.953 55.55,58.953 v1(55.575,58.979) ; v1(55.04,46.851) 55.665,47.475 56.288,47.475 56.718,47.905 56.718,48.184 57.336,48.801 C8.2 58.115,49.974 58.458,50.317 L1.2
3V34: C23.2 C26.2 C27.2 IC3.10 IC3.48 L3.2 | length 26
  Layer 2 w0.508: v1(49.124,62.027) 45.314,62.027 44.772,62.568 v1(44.772,64.194) 44.772,68.953 45.796,69.977 v1(49.327,69.977)
  Bottom Layer w0.254: v1(49.327,69.977) 49.327,68.813 49.403,68.737 49.805,68.737 49.969,68.573 IC3.10 ; C23.2@51.029,62.408 51.469,62.408 51.542,62.481 IC3.48
  Bottom Layer w0.305: v1(49.124,62.027) 49.172,62.075 49.629,62.075 49.883,62.329 50.95,62.329 C23.2
  Bottom Layer w0.508: v1(44.772,64.194) C26.2 44.772,66.891 45.013,67.132 L3.2
3V35: C32.2 C35.2 C36.2 IC4.10 IC4.48 L4.2 | length 22.8
  Top Layer w0.254: C36.2 49.373,46.431 49.449,46.508 49.449,46.604 49.53,46.685 49.53,46.914 49.731,47.115 IC4.10 ; IC4.48@51.269,52.329 IC4.48 51.254,53.272 50.978,53.548 C32.2 50.978,53.742 51.054,53.818 51.532,53.818 51.638,53.924 v1(51.664,53.924)
  Top Layer w0.356: L4.2 45.72,43.848 45.796,43.772 C35.2 47.303,43.772 47.752,44.221 ; v1(48.692,44.196) 48.666,44.221 47.752,44.221 ; C36.2 48.463,46.431 47.752,45.72 47.752,44.221
  Layer 1 w0.254: v1(48.692,44.196) 49.784,45.288 49.784,52.045 v1(51.664,53.924)
6S: "pad.BUS BAR"@41.732,56.312 "pad.BUS BAR"@62.332,56.185 C1.2 C2.2 C13.2 C29.2 IC1.8 IC2.8 IC3.8 IC4.8 J1.8 Q1.5 Q1.6 Q1.7 Q1.8 Q1.9 Q2.5 Q2.6 Q2.7 Q2.8 Q2.9 Q3.5 Q3.6 Q3.7 Q3.8 Q3.9 Q7.5 Q7.6 Q7.7 Q7.8 Q7.9 Q8.5 Q8.6 Q8.7 Q8.8 Q8.9 Q9.5 Q9.6 Q9.7 Q9.8 Q9.9 Q13.5 Q13.6 Q13.7 Q13.8 Q13.9 Q14.5 Q14.6 Q14.7 Q14.8 Q14.9 Q15.5 Q15.6 Q15.7 Q15.8 Q15.9 Q19.5 Q19.6 Q19.7 Q19.8 Q19.9 Q20.5 Q20.6 Q20.7 Q20.8 Q20.9 Q21.5 Q21.6 Q21.7 Q21.8 Q21.9 R32.2 R33.2 U3.4 | length 25.4
  Top Layer w0.254: R32.2@46.152,38.206 R32.2@46.223,38.278 ; C29.2 48.844,48.039 48.921,48.115 IC4.8 51.29,48.115 51.613,48.438 51.689,48.438 51.841,48.59 v1(51.841,48.666) ; U3.4 56.513,40.935 58.729,38.718 R33.2
  Layer 1 w0.254: v2(47.371,39.573) 48.006,38.938 v2(58.852,38.938)
  Bottom Layer w0.254: v2(49.327,67.361) 49.936,67.361 50.149,67.573 IC3.8 ; IC1.8 54.584,40.97 54.661,41.046 C13.2 ; IC2.8 53.232,53.476 53.769,53.476 54.014,53.721 v2(54.61,53.721)
BEMFA2: IC1.45 R21.1 R22.2 R28.1 | length 3.8
  Bottom Layer w0.203: R22.2 R28.1 R21.1 50.703,47.041 51.03,46.714 IC1.45
BEMFA3: IC2.45 R1.1 R2.2 R8.1 | length 3.7
  Bottom Layer w0.254: R2.2 R8.1 R1.1 51.01,59.505 51.01,57.699 IC2.45
BEMFA4: IC3.45 R18.1 R19.2 R46.1 | length 4.4
  Bottom Layer w0.254: IC3.45 53.042,62.139 53.646,61.535 54.111,61.535 R18.1 R46.1 R19.2
BEMFA5: IC4.45 R56.1 R57.2 R63.1 | length 4.2
  Top Layer w0.254: IC4.45 52.754,54.003 53.234,54.483 R56.1 R63.1 54.166,54.495 55.029,54.495 R57.2
BEMFB2: IC1.1 R23.1 R24.2 R29.1 | length 3.4
  Bottom Layer w0.203: IC1.1 53.919,44.47 54.166,44.718 54.462,44.718 R23.1 R29.1 55.547,44.884 56.437,44.884 R24.2
BEMFB3: IC2.1 R3.1 R4.2 R9.1 | length 3.7
  Bottom Layer w0.203: IC2.1 53.317,56.979 53.365,57.027 53.365,57.353 53.823,57.81 54.584,57.81 R3.1 R9.1 R4.2
BEMFB4: IC3.1 R20.1 R42.2 R47.1 | length 4.2
  Bottom Layer w0.254: R42.2 R47.1 R20.1 50.673,63.093 50.842,63.262 IC3.1
BEMFB5: IC4.1 R58.1 R59.2 R64.1 | length 4.1
  Top Layer w0.203: R59.2 R64.1 R58.1 49.022,52.654 49.962,52.654 50.368,52.248 50.368,51.664 50.417,51.615 IC4.1
BEMFC2: IC1.23 R25.1 R26.2 R30.1 | length 4.2
  Bottom Layer w0.203: R26.2 R30.1 R25.1 47.346,37.338 47.53,37.522 IC1.23
BEMFC3: IC2.23 R5.1 R6.2 R10.1 | length 4.4
  Bottom Layer w0.203: R6.2 R10.1 R5.1 47.346,49.581 47.53,49.765 IC2.23
BEMFC4: IC3.23 R43.1 R44.2 R48.1 | length 3.7
  Bottom Layer w0.254: IC3.23 56.542,71.329 57.095,71.882 R43.1 R48.1 R44.2
BEMFC5: IC4.23 R60.1 R61.2 R65.1 | length 4.5
  Top Layer w0.203: IC4.23 56.3,45.37 56.3,44.722 56.419,44.603 58.09,44.603 R60.1 R65.1 R61.2
BOOT02: IC1.42 R27.2 | length 3
  Bottom Layer w0.203: R27.2 48.036,47.041 48.204,46.872 48.204,46.713 48.576,46.341 49.411,46.341 49.53,46.222 IC1.42
BOOT03: IC2.42 R7.2 | length 3
  Bottom Layer w0.254: R7.2 48.285,58.924 48.434,58.775 49.381,58.775 49.53,58.626 IC2.42
BOOT04: IC3.42 R45.2 | length 3.9
  Bottom Layer w0.254: IC3.42 54.542,62.451 54.813,62.179 56.489,62.179 56.672,61.996 56.672,61.611 56.815,61.468 R45.2
BOOT05: IC4.42 R62.2 | length 3.5
  Top Layer w0.254: IC4.42 54.274,52.335 54.274,52.877 54.483,53.086 55.474,53.086 55.859,53.472 55.859,53.797 56.388,54.326 R62.2
CLK2: IC1.38 pad.0.8MM@43.891,47.32 | length 4.9
  Bottom Layer w0.203: pad.0.8MM@43.891,47.32 44.088,47.123 44.596,47.123 45.06,46.66 46.631,46.66 47.53,45.761 IC1.38
CLK3: IC2.38 pad.0.8MM@44.628,60.173 | length 4.6
  Bottom Layer w0.254: pad.0.8MM@44.628,60.173 45.159,60.173 46.2,59.131 47.168,59.131 47.53,58.769 IC2.38
CLK4: IC3.38 pad.0.8MM@59.042,60.392 | length 4.6
  Bottom Layer w0.203: IC3.38 56.542,62.737 57.235,62.043 57.422,62.043 57.609,61.857 57.609,60.94 58.148,60.401 58.856,60.401 pad.0.8MM@59.042,60.392
CLK5: IC4.38
ESC2: J1.5 R35.1
ESC3: J1.4 R17.1
ESC4: J1.3 R55.1
ESC5: J1.2 R72.1
GHA2: IC1.33 R36.2 | length 21.2
  Layer 2 w0.305: v1(30.683,50.419) 30.759,50.495 40.141,50.495 47.422,43.214 v1(47.422,42.977)
  Bottom Layer w0.203: IC1.33 46.374,42.926 46.425,42.977 v1(47.422,42.977)
GHA3: IC2.33 R11.2 | length 28.5
  Top Layer w0.305: R11.2@32.36,73.66 v1(32.41,73.66)
  Layer 2 w0.305: v1(32.41,73.66) 32.41,68.707 33.858,67.259 35.704,67.259 41.336,61.627 41.336,58.333 43.536,56.134 46.736,56.134 v1(47.391,55.479)
  Bottom Layer w0.254: IC2.33 v1(47.391,55.479)
GHA4: IC3.33 R49.2 | length 22
  Top Layer w0.305: R49.2@73.965,60.935 v1(73.99,60.935)
  Layer 2 w0.305: v1(56.617,65.583) 58.852,65.583 59.36,65.075 68.377,65.075 69.063,64.389 69.063,61.747 69.875,60.935 v1(73.99,60.935)
  Bottom Layer w0.254: v1(56.617,65.583) 56.626,65.573 IC3.33
GHA5: IC4.33 R66.2 | length 22.8
  Top Layer w0.254: v1(55.982,49.632) 56.388,49.632 56.852,50.095 57.435,50.095 IC4.33
  Top Layer w0.305: v1(73.99,54.889) R66.2
  Layer 2 w0.305: v1(55.982,49.632) 55.982,51.181 57.201,52.4 63.322,52.4 65.684,54.762 73.795,54.762 73.922,54.889 v1(73.99,54.889)
GHB2: IC1.29 R37.2 | length 17.2
  Layer 2 w0.305: v1(32.233,42.85) 34.554,42.85 35.053,43.349 37.88,43.349 39.976,41.254 46.856,41.254 47.139,40.97 v1(47.269,40.97)
  Bottom Layer w0.203: IC1.29 46.341,40.958 46.353,40.97 v1(47.269,40.97)
GHB3: IC2.29 R12.2 | length 21.1
  Top Layer w0.305: v1(30.734,61.595) R12.2
  Layer 2 w0.305: v1(30.734,61.595) 33.223,61.595 34.874,59.944 35.458,59.944 36.601,58.801 39.093,56.309 40.142,56.309 42.984,53.467 47.295,53.467 47.32,53.492 v1(47.346,53.467)
  Bottom Layer w0.254: IC2.29 46.342,53.467 46.348,53.473 47.34,53.473 v1(47.346,53.467)
GHB4: IC3.29 R50.2 | length 17.3
  Layer 2 w0.305: v1(56.566,67.589) 60.808,67.589 61.764,68.545 70.146,68.545 71.069,69.469 71.806,69.469 v1(71.857,69.418)
  Bottom Layer w0.254: v1(56.566,67.589) 56.577,67.579 57.736,67.579 IC3.29
GHB5: IC4.29 R67.2 | length 21.4
  Top Layer w0.254: v1(56.109,46.787) 56.236,46.914 56.236,47.854 56.497,48.115 IC4.29
  Top Layer w0.305: v1(74.016,49.301) R67.2
  Layer 1 w0.305: v1(56.109,46.787) 57.836,48.514 66.243,48.514 66.827,49.098 73.813,49.098 v1(74.016,49.301)
GHC2: IC1.25 R38.2 | length 19.5
  Top Layer w0.305: R38.2 33.554,30.48 34.468,30.48 v1(34.493,30.455)
  Layer 2 w0.305: v1(34.493,30.455) 41.269,30.455 43.942,33.128 v1(43.942,38.43)
  Bottom Layer w0.203: v1(43.942,38.43) 45.225,38.43 45.747,38.953 46.312,38.953 IC1.25
GHC3: IC2.25 R13.2 | length 18.2
  Layer 2 w0.305: v1(30.734,55.905) 36.394,55.905 41.805,50.495 v1(44.171,50.495)
  Bottom Layer w0.254: v1(44.171,50.495) 45.071,50.495 46.055,51.479 IC2.25
GHC4: IC3.25 R51.2 | length 21.3
  Top Layer w0.305: v1(72.238,81.204) 72.446,80.996 73.157,80.996 R51.2 R51.2@73.164,80.911
  Layer 2 w0.305: v1(58.852,70.739) 59.195,71.082 59.195,72.053 68.346,81.204 v1(72.238,81.204)
  Bottom Layer w0.254: IC3.25 57.742,70.112 58.369,70.739 v1(58.852,70.739)
GHC5: IC4.25 R68.2 | length 20.5
  Top Layer w0.254: IC4.25 57.729,46.115 58.175,45.669 v1(59.868,45.669)
  Layer 1 w0.305: v1(59.868,45.669) 60.757,44.78 60.757,39.827 63.5,37.084 70.95,37.084 71.153,37.287 v1(71.222,37.287)
GLA2: IC1.36 R39.2 | length 2
  Bottom Layer w0.203: R39.2 44.653,45.082 44.822,44.913 45.051,44.913 45.494,44.47 IC1.36
GLA3: IC2.36 R14.2 | length 2.2
  Bottom Layer w0.254: R14.2 44.653,57.857 44.796,57.714 45.106,57.714 45.339,57.48 45.339,57.252 45.612,56.979 IC2.36
GLA4: IC3.36 R52.2 | length 2.1
  Bottom Layer w0.254: IC3.36 57.765,64.05 58.327,64.05 58.522,63.856 58.522,63.525 58.801,63.246 R52.2
GLA5: IC4.36 R69.2 | length 1.6
  Top Layer w0.254: IC4.36 58.112,51.615 58.521,52.024 58.632,52.024 58.775,52.167 R69.2
GLB2: IC1.32 R40.2 | length 1.8
  Bottom Layer w0.203: R40.2 45.288,42.774 45.592,42.47 IC1.32
GLB3: IC2.32 R15.2 | length 1.8
  Bottom Layer w0.203: R15.2 45.316,55.245 45.582,54.979 IC2.32
GLB4: IC3.32 R53.2 | length 1.7
  Bottom Layer w0.254: IC3.32 58.514,66.073 58.725,65.862 59.207,65.862 R53.2
GLB5: IC4.32 R70.2 | length 1.5
  Top Layer w0.254: IC4.32 58.124,49.615 58.349,49.84 58.632,49.84 58.775,49.983 R70.2
GLC2: IC1.28 R41.2 | length 1.7
  Bottom Layer w0.203: R41.2 44.69,40.476 46.324,40.476 IC1.28
GLC3: IC2.28 R16.2 | length 1.8
  Bottom Layer w0.203: R16.2 44.679,52.76 44.847,52.929 44.877,52.929 44.927,52.979 IC2.28
GLC4: IC3.28 R54.2 | length 1.7
  Bottom Layer w0.254: IC3.28 59.187,68.073 59.334,68.22 R54.2
GLC5: IC4.28 R71.2 | length 1.4
  Top Layer w0.254: IC4.28 58.567,47.615 58.775,47.824 R71.2
GND: "pad.BUS BAR"@41.769,56.816 "pad.BUS BAR"@62.269,56.816 C1.1 C2.1 C3.1 C4.1 C5.1 C8.1 C9.1 C11.1 C12.1 C13.1 C14.1 C15.1 C16.1 C17.1 C20.1 C21.1 C23.1 C26.1 C27.1 C29.1 C30.1 C31.1 C32.1 C35.1 C36.1 D1.A D2.A D3.A D4.A IC1.44 IC1.49 IC2.44 IC2.49 IC3.44 IC3.49 IC4.44 IC4.49 J1.7 pad.XT60@49.391,32.79 Q4.1 Q4.2 Q4.3 Q5.1 Q5.2 Q5.3 Q6.1 Q6.2 Q6.3 Q10.1 Q10.2 Q10.3 Q11.1 Q11.2 Q11.3 Q12.1 Q12.2 Q12.3 Q16.1 Q16.2 Q16.3 Q17.1 Q17.2 Q17.3 Q18.1 Q18.2 Q18.3 Q22.1 Q22.2 Q22.3 Q23.1 Q23.2 Q23.3 Q24.1 Q24.2 Q24.3 R7.1 R8.2 R9.2 R10.2 R27.1 R28.2 R29.2 R30.2 R34.2 R45.1 R46.2 R47.2 R48.2 R62.1 R63.2 R64.2 R65.2 U3.2 | length 11.7
  Top Layer w0.356: R34.2 50.203,41.846 51.895,41.846 U3.2 51.983,41.935 56.058,41.935 C17.1
  Bottom Layer w0.356: R30.2 45.115,36.474 45.207,36.382 45.207,36.235 45.269,36.174 45.269,34.816 ; C26.1 C26.1@46.325,65.24 ; C11.1@47.559,65.24 C11.1 ; C12.1@48.438,66.324 48.463,66.35 C1.1
  Bottom Layer w0.508: C26.1@46.325,65.24 C11.1@47.559,65.24 ; C11.1 47.788,65.443 47.788,65.95 48.161,66.324 C12.1@48.438,66.324
  other v2: 47.391,31.04 48.141,31.04 48.891,31.04 49.641,31.04 50.391,31.04 51.141,31.04 47.141,31.79 47.891,31.79 48.641,31.79 49.391,31.79 50.141,31.79 50.891,31.79 51.641,31.79 47.141,32.54 47.891,32.54 48.641,32.54 49.391,32.54 50.141,32.54 50.891,32.54 51.641,32.54 47.141,33.29 47.891,33.29 48.641,33.29 49.391,33.29 50.141,33.29 50.891,33.29 51.641,33.29 47.141,34.04 47.891,34.04 48.641,34.04 49.391,34.04 50.141,34.04 50.891,34.04 51.641,34.04 47.391,34.79 48.141,34.79 48.891,34.79 49.641,34.79 50.391,34.79 51.141,34.79 50.216,41.859
IO2: IC1.37 pad.0.8MM@43.891,46.253 | length 3.8
  Bottom Layer w0.203: pad.0.8MM@43.891,46.253 pad.0.8MM@44.131,46.257 ; pad.0.8MM@44.131,46.253 46.293,46.253 46.981,45.566 46.981,45.219 IC1.37
IO3: IC2.37 pad.0.8MM@44.628,59.055 | length 3.4
  Bottom Layer w0.254: pad.0.8MM@44.628,59.055 45.124,59.055 45.613,58.565 46.881,58.565 47.03,58.417 IC2.37
IO4: IC3.37 pad.0.8MM@59.03,61.544 | length 3.1
  Bottom Layer w0.203: IC3.37 57.09,63.325 57.09,63.05 58.015,62.125 58.015,61.858 58.329,61.544 pad.0.8MM@59.03,61.544
IO5: IC4.37
MOTOR2A: C18.1 IC1.34 pad.0.8MM@30.455,53.162 Q7.1 Q7.2 Q7.3 Q10.5 Q10.6 Q10.7 Q10.8 Q10.9 R22.1 | length 28.4
  Layer 1 w0.254: v1(43.631,44.228) 43.847,44.228 46.99,47.371 v1(46.99,48.514)
  Layer 1 w0.305: v1(31.242,52.883) 36.398,47.727 39.295,47.727 42.793,44.228 v1(43.631,44.228)
  Bottom Layer w0.203: v1(43.631,44.228) 43.783,44.228 C18.1 43.815,44.196 43.815,43.79 44.134,43.47 IC1.34
  Bottom Layer w0.254: 30.455,53.162 30.963,53.162 v1(31.242,52.883) ; v1(46.99,48.514) 48.746,48.514 48.895,48.365 R22.1
MOTOR2B: C19.1 IC1.30 pad.0.8MM@30.455,47.6 Q8.1 Q8.2 Q8.3 Q11.5 Q11.6 Q11.7 Q11.8 Q11.9 R24.1 | length 34.1
  Layer 1 w0.305: v2(43.764,41.91) 48.057,41.91 49.262,43.115 v1(57.433,43.115)
  Layer 2 w0.305: v1(30.988,47.117) 35.408,47.117 40.615,41.91 v2(43.764,41.91)
  Bottom Layer w0.203: C19.1 43.789,41.369 43.908,41.25 45.242,41.25 45.463,41.47 IC1.30
  Bottom Layer w0.305: R24.1 56.439,44.093 56.44,44.095 57.023,44.095 57.433,43.685 v1(57.433,43.115)
MOTOR2C: C22.1 IC1.26 pad.0.8MM@30.429,34.29 Q9.1 Q9.2 Q9.3 Q12.5 Q12.6 Q12.7 Q12.8 Q12.9 R26.1 | length 19.2
  Layer 1 w0.305: v1(39.395,37.414) 41.622,39.641 v2(43.753,39.641)
  Bottom Layer w0.203: R26.1 44.171,36.449 43.468,36.449 43.349,36.568 43.349,39.1 43.675,39.426 43.688,39.426 43.789,39.527 C22.1@43.789,39.54 ; IC1.26 45.614,39.47 45.163,39.019 44.034,39.019 43.873,39.18 C22.1@43.873,39.456 ; C22.1@43.789,39.54 C22.1@43.873,39.456 ; C22.1@43.789,39.54 C22.1 43.873,39.54 C22.1@43.873,39.456
  Bottom Layer w0.254: Q12.9 36.881,35.323 36.881,36.932 37.363,37.414 v1(39.395,37.414)
MOTOR3A: C6.1 IC2.34 pad.0.8MM@33.14,78.664 Q1.1 Q1.2 Q1.3 Q4.5 Q4.6 Q4.7 Q4.8 Q4.9 R2.1 | length 36.2
  Layer 2 w0.305: v1(33.045,77.419) 35.789,74.676 37.649,74.676 40.043,72.282 40.043,65.672 42.376,63.338 42.376,58.79 43.749,57.418 43.749,57.038 v2(43.789,56.998) 47.244,60.452 v1(49.174,60.452)
  Bottom Layer w0.203: v2(43.789,56.998) 43.789,56.376 44.186,55.979 IC2.34
  Bottom Layer w0.305: Q4.6 32.982,77.419 v1(33.045,77.419)
MOTOR3B: C7.1 IC2.30 pad.0.8MM@33.14,64.719 Q2.1 Q2.2 Q2.3 Q5.5 Q5.6 Q5.7 Q5.8 Q5.9 R4.1 | length 31.5
  Layer 2 w0.305: v1(32.94,63.377) 35.052,61.265 36.292,61.265 43.2,54.356 v2(43.815,54.356) 48.311,54.356 49.327,55.372 54.737,55.372 v1(56.388,57.023)
  Bottom Layer w0.203: v2(43.815,54.356) 43.815,53.865 43.934,53.746 45.237,53.746 45.47,53.979 IC2.30
  Bottom Layer w0.305: v1(32.94,63.377) Q5.6 ; v1(56.388,57.023) R4.1
MOTOR3C: C10.1 IC2.26 pad.0.8MM@33.115,58.953 Q3.1 Q3.2 Q3.3 Q6.5 Q6.6 Q6.7 Q6.8 Q6.9 R6.1 | length 20.4
  Layer 2 w0.305: v1(32.931,57.658) 36.099,57.658 41.915,51.841 v2(43.815,51.841)
  Bottom Layer w0.203: C10.1@43.713,51.643 C10.1@43.764,51.694 ; v2(43.815,51.841) 43.815,51.643 43.815,51.325 ; R6.1 43.561,48.717 43.409,48.87 43.409,50.902 43.815,51.308 43.815,51.325 ; IC2.26 46.306,51.956 45.48,51.956 45.187,51.663 45.187,51.415 45.008,51.237 44.492,51.237 44.462,51.206 43.934,51.206 43.815,51.325
MOTOR4A: C24.1 IC3.34 pad.0.8MM@73.533,57.633 Q13.1 Q13.2 Q13.3 Q16.5 Q16.6 Q16.7 Q16.8 Q16.9 R19.1 | length 27.2
  Layer 2 w0.305: v1(56.109,59.69) 58.09,59.69 58.522,60.122 58.522,63.398 59.258,64.135 v2(60.198,64.135) 67.589,64.135 68.072,63.652 68.072,61.239 70.333,58.979 71.704,58.979 v1(71.73,58.953)
  Bottom Layer w0.254: IC3.34 58.777,65.073 58.928,64.922 60.046,64.922 60.198,64.77 v2(60.198,64.135)
  Bottom Layer w0.305: R19.1@55.969,60.591 R19.1 55.956,59.911 56.109,59.759 v1(56.109,59.69)
MOTOR4B: C25.1 IC3.30 pad.0.8MM@71.609,63.449 Q14.1 Q14.2 Q14.3 Q17.5 Q17.6 Q17.7 Q17.8 Q17.9 R42.1 | length 33.6
  Layer 2 w0.305: v1(46.609,63.957) 55.422,63.957 55.601,64.136 55.601,66.269 55.956,66.624 v2(60.198,66.624) 61.011,66.624 62.161,67.774 69.69,67.774 v1(70.231,67.234)
  Bottom Layer w0.254: IC3.30 58.437,67.073 58.776,67.412 59.969,67.412 60.198,67.183 v2(60.198,66.624)
  Bottom Layer w0.305: v1(46.609,63.957) R42.1 ; v1(70.231,67.234) 71.628,67.234 71.809,67.052 Q17.5
MOTOR4C: C28.1 IC3.26 pad.0.8MM@73.66,77.318 Q15.1 Q15.2 Q15.3 Q18.5 Q18.6 Q18.7 Q18.8 Q18.9 R44.1 | length 24.5
  Top Layer w0.305: v1(71.584,77.368) pad.0.8MM@73.66,77.318
  Layer 2 w0.305: v1(60.096,70.155) 60.096,71.302 66.163,77.368 v1(71.584,77.368)
  Bottom Layer w0.254: IC3.26 57.762,69.093 58.304,69.093 58.497,69.286 58.497,69.648 58.776,69.926 v1@60.02,69.926 ; R44.1 59.947,72.746 60.096,72.597 v1(60.096,70.155) v1@60.096,70.104 ; 60.096,69.85 60.198,69.748 C28.1
MOTOR5A: C33.1 IC4.34 pad.0.8MM@71.609,52.019 Q19.1 Q19.2 Q19.3 Q22.5 Q22.6 Q22.7 Q22.8 Q22.9 R57.1 | length 24.4
  Top Layer w0.254: IC4.34 58.341,50.615 58.384,50.658 59.37,50.658 59.563,50.851 59.563,51.232 C33.1 v1@60.325,51.308
  Top Layer w0.305: R57.1 59.614,55.372 60.35,54.635 v1(60.35,51.333) v1@60.325,51.308
  Layer 2 w0.305: v1(60.35,51.333) 60.681,51.664 64.313,51.664 65.938,53.289 v1(71.609,53.289)
MOTOR5B: C34.1 IC4.30 pad.0.8MM@71.601,46.457 Q20.1 Q20.2 Q20.3 Q23.5 Q23.6 Q23.7 Q23.8 Q23.9 R59.1 | length 32.6
  Top Layer w0.254: v1(46.025,50.571) 46.083,50.63 46.083,50.736 47.163,51.816 R59.1 ; IC4.30 58.314,48.615 58.435,48.493 59.466,48.493 59.563,48.59 59.563,49.047 C34.1 59.716,49.2 59.716,49.162 60.312,49.162 v1(60.35,49.2) ; pad.0.8MM@71.601,47.727 v1(71.603,47.727)
  Layer 2 w0.254: v1(71.603,47.727) v1@71.603,47.777
  Layer 2 w0.305: v1(46.025,50.571) 53.238,50.571 55.169,48.641 56.718,48.641 57.277,49.2 v1(60.35,49.2) 63.297,49.2 63.983,48.514 70.866,48.514 v1@71.603,47.777
MOTOR5C: C37.1 IC4.26 pad.0.8MM@73.711,33.096 Q21.1 Q21.2 Q21.3 Q24.5 Q24.6 Q24.7 Q24.8 Q24.9 R61.1 | length 27.1
  Top Layer w0.203: R61.1 60.485,43.84 60.574,43.929 60.574,45.789 60.391,45.972 v1(60.391,46.667)
  Top Layer w0.254: IC4.26 58.15,46.615 58.486,46.279 59.491,46.279 59.639,46.428 C37.1 ; C37.1@59.639,46.838 60.138,46.838 60.309,46.667 v1(60.391,46.667)
  Layer 2 w0.305: v1(60.391,46.667) 60.44,46.619 60.656,46.619 62.992,44.283 62.992,38.532 65.151,36.373 69.748,36.373 71.704,34.417
  Bottom Layer w0.305: Q24.6@71.704,34.417 Q24.6
  other v1: 71.018,34.392
NetC6_2: C6.2 IC2.35 | length 1.9
  Bottom Layer w0.203: C6.2@44.653,56.901 45.075,56.479 IC2.35
  Bottom Layer w0.254: C6.2@44.653,56.901 C6.2
NetC7_2: C7.2 IC2.31 | length 1.7
  Bottom Layer w0.203: C7.2 44.679,54.377 44.78,54.479 IC2.31
NetC10_2: C10.2 IC2.27 | length 2
  Bottom Layer w0.203: C10.2 44.679,51.938 44.78,52.04 44.989,52.04 45.428,52.479 IC2.27
NetC18_2: C18.2 IC1.35 | length 1.8
  Bottom Layer w0.203: C18.2 45.047,44.221 45.298,43.97 IC1.35
NetC19_2: C19.2 IC1.31 | length 1.7
  Bottom Layer w0.203: C19.2 45.302,41.885 45.388,41.97 IC1.31
NetC22_2: C22.2 IC1.27 | length 1.8
  Bottom Layer w0.203: C22.2 44.709,39.68 45.143,39.68 45.433,39.97 IC1.27
NetC24_2: C24.2 IC3.35 | length 1.8
  Bottom Layer w0.254: IC3.35 58.474,64.573 58.899,64.148 59.321,64.148 C24.2
NetC25_2: C25.2 IC3.31 | length 1.6
  Bottom Layer w0.254: IC3.31 59.283,66.573 C25.2
NetC28_2: C28.2 IC3.27 | length 1.9
  Bottom Layer w0.254: IC3.27 58.438,68.573 58.831,68.966 59.258,68.966 59.334,69.042 C28.2
NetC33_2: C33.2 IC4.35 | length 1.5
  Top Layer w0.254: IC4.35 58.679,51.115 58.775,51.211 C33.2
NetC34_2: C34.2 IC4.31 | length 1.3
  Top Layer w0.254: IC4.31 57.459,49.119 58.771,49.119 C34.2
NetC37_2: C37.2 IC4.27 | length 1.4
  Top Layer w0.254: IC4.27 57.462,47.123 58.699,47.123 58.775,47.047 C37.2
NetD1_C: D1.C IC2.9 L1.1
NetD2_C: D2.C IC1.9 L2.1
NetD3_C: D3.C IC3.9 L3.1
NetD4_C: D4.C IC4.9 L4.1
NetIC1_3: IC1.3 IC1.4 | length 0.6
  Bottom Layer w0.203: IC1.4 IC1.3 IC1.3@53.278,43.422
NetIC1_13: IC1.13 R35.2 | length 1.6
  Bottom Layer w0.203: IC1.13 52.541,38.259 52.541,36.664 R35.2
NetIC2_3: IC2.3 IC2.4 | length 0.5
  Bottom Layer w0.203: IC2.4 IC2.3
NetIC2_13: IC2.13 R17.2 | length 1.7
  Bottom Layer w0.254: IC2.13 52.53,50.158 53.116,49.572 53.259,49.429 R17.2
NetIC3_3: IC3.3 IC3.4 | length 0.5
  Bottom Layer w0.254: IC3.3 IC3.4
NetIC3_13: IC3.13 R55.2 | length 1.9
  Bottom Layer w0.203: R55.2 50.881,71.882 51.542,71.221 IC3.13
NetIC4_3: IC4.3 IC4.4 | length 0.5
  Top Layer w0.254: IC4.4 IC4.3
NetIC4_13: IC4.13 R72.2
NetJ1_6: J1.6 R31.2 R34.1 | length 0.9
  Top Layer w0.305: R34.1 R31.2
NetQ1_4: Q1.4 R11.1 | length 2.1
  Top Layer w0.406: R11.1 32.41,75.394 32.618,75.602 32.618,75.902 32.84,76.124 Q1.4
NetQ2_4: Q2.4 R12.1 | length 1.8
  Top Layer w0.406: R12.1 32.38,61.595 32.618,61.833 32.618,61.957 32.84,62.179 Q2.4
NetQ3_4: Q3.4 R13.1 | length 1.8
  Top Layer w0.406: R13.1 32.355,55.905 32.593,56.143 32.593,56.192 32.815,56.413 Q3.4
NetQ4_4: Q4.4 R14.1 | length 20.5
  Layer 2 w0.305: v1(39.726,74.676) 39.726,73.966 41.283,72.408 41.283,65.981 43.663,63.602 v2(43.663,59.08)
  Bottom Layer w0.305: Q4.4 38.957,76.124 39.229,75.851 39.229,75.551 39.677,75.104 39.677,74.725 v1(39.726,74.676) ; v2(43.663,59.08) 43.719,59.024 43.719,57.957 R14.1
NetQ5_4: Q5.4 R15.1 | length 9.7
  Layer 2 w0.305: v1(39.954,61.214) 39.954,58.718 43.39,55.282 43.816,55.282 v2(43.834,55.264)
  Bottom Layer w0.305: Q5.4@38.744,62.075 Q5.4 38.94,62.179 39.905,61.214 v1(39.954,61.214)
NetQ6_4: Q6.4 R16.1 | length 7
  Layer 2 w0.305: v1@39.927,55.287 42.483,52.73 v2(43.815,52.73)
  Bottom Layer w0.305: Q6.4@38.904,56.115 Q6.4 38.931,56.388 39.757,55.562 39.843,55.562 v1(39.892,55.513)
NetQ7_4: Q7.4 R36.1 | length 1.7
  Top Layer w0.406: R36.1 32.485,50.419 32.815,50.749 Q7.4
NetQ8_4: Q8.4 R37.1 | length 2
  Top Layer w0.305: R37.1 32.233,44.604 32.815,45.187 Q8.4
NetQ9_4: Q9.4 R38.1 | length 1.7
  Top Layer w0.305: R38.1 32.664,31.604 32.937,31.877 Q9.4 Q9.4@33.102,31.864
NetQ10_4: Q10.4 R39.1 | length 8
  Layer 2 w0.305: v1(39.878,49.86) 39.878,49.048 43.79,45.136 v2(43.79,45.11)
  Bottom Layer w0.254: Q10.4 38.913,50.451 39.287,50.451 v1(39.878,49.86)
NetQ11_4: Q11.4 R40.1 | length 6.3
  Layer 2 w0.305: v1(39.74,44.189) 41.155,42.774 v2(43.79,42.774)
  Bottom Layer w0.305: Q11.4 38.931,45.187 39.74,44.378 v1(39.74,44.189)
NetQ12_4: Q12.4 R41.1 | length 12.8
  Layer 2 w0.305: v1(40.081,31.445) 40.081,34.188 41.251,35.358 41.251,38.966 42.823,40.538 v1(43.764,40.538)
  Bottom Layer w0.305: Q12.4 39.649,31.877 v1(40.081,31.445) ; v1(43.764,40.538) R41.1
NetQ13_4: Q13.4 R49.1 | length 1.8
  Top Layer w0.305: Q13.4@71.609,60.223 71.882,60.496 72.718,60.496 73.126,60.905 R49.1
NetQ14_4: Q14.4 R50.1 | length 3.4
  Top Layer w0.305: Q14.4@71.609,65.989 71.909,65.989 72.542,66.622 72.542,67.899 71.887,68.554 R50.1
NetQ15_4: Q15.4 R51.1 | length 1.7
  Top Layer w0.305: Q15.4@71.609,79.934 73.021,79.934 73.173,80.086 R51.1
NetQ16_4: Q16.4 R52.1 | length 7.2
  Layer 2 w0.305: v2(60.198,63.246) 62.179,63.246 v1(64.135,61.29)
  Bottom Layer w0.305: v1(64.135,61.29) 65.043,61.29 Q16.4
NetQ17_4: Q17.4 R53.1 | length 6.9
  Layer 2 w0.305: v2(60.198,65.735) 61.925,65.735 63.271,67.081 v1(64.11,67.081)
  Bottom Layer w0.305: v1(64.11,67.081) 65.017,67.081 Q17.4
NetQ18_4: Q18.4 R54.1 | length 17.3
  Layer 1 w0.305: v2(60.198,68.25) 61.468,69.52 61.468,78.994 v1(63.627,81.153)
  Bottom Layer w0.305: v1(63.627,81.153) 64.641,80.139 65.904,80.139 Q18.4
NetQ19_4: Q19.4 R66.1 | length 1.7
  Top Layer w0.305: Q19.4@71.609,54.559 71.882,54.832 72.278,54.832 72.361,54.915 R66.1
NetQ20_4: Q20.4 R67.1 | length 1.7
  Top Layer w0.305: Q20.4@71.601,48.997 71.825,49.221 72.563,49.221 72.619,49.276 R67.1
NetQ21_4: Q21.4 R68.1 | length 1.8
  Top Layer w0.305: Q21.4@71.601,35.687 71.773,35.859 71.773,36.391 72.06,36.678 R68.1
NetQ22_4: Q22.4 R69.1 | length 9
  Top Layer w0.254: R69.1 59.766,52.197 59.614,52.349 59.639,52.375 v1(59.639,53.67)
  Layer 2 w0.305: v1(59.639,53.67) 62.662,53.67 v1(64.084,55.093)
  Bottom Layer w0.305: v1(64.084,55.093) 65.576,55.093 Q22.4
NetQ23_4: Q23.4 R70.1 | length 7
  Top Layer w0.305: R70.1 59.69,49.962 59.69,49.999 59.757,50.066 60.48,50.066 v1(60.528,50.114)
  Layer 2 w0.305: v1(60.528,50.114) 63.805,50.114 v1(64.11,49.809)
  Bottom Layer w0.305: v1(64.11,49.809) 64.997,49.809 65.809,48.997 Q23.4
NetQ24_4: Q24.4 R71.1 | length 16.8
  Top Layer w0.254: R71.1 v1(60.325,47.854)
  Layer 2 w0.305: v1(60.325,47.854) 63.017,47.854 64.211,46.66 64.211,38.786 v1(65.253,37.744)
  Bottom Layer w0.305: v1(65.253,37.744) 66.109,36.888 Q24.4
NetR31_1: R31.1 U3.1 | length 1.8
  Top Layer w0.305: R31.1 50.234,42.766 51.63,42.766 U3.1@51.816,42.951
PA62: IC1.17 IC1.21 | length 3.9
  Bottom Layer w0.203: IC1.21 48.53,37.391 48.649,37.272 50.411,37.272 50.53,37.391 IC1.17
PA63: IC2.17 IC2.21 | length 3.8
  Bottom Layer w0.254: IC2.21 48.53,49.933 48.678,49.784 50.381,49.784 50.53,49.933 IC2.17
PA64: IC3.17 IC3.21 | length 4.3
  Bottom Layer w0.254: IC3.17 53.542,71.347 53.696,71.501 55.393,71.501 55.542,71.352 IC3.21
PA65: IC4.17 IC4.21
PF12: IC1.5 IC1.47 | length 3.6
  Bottom Layer w0.203: IC1.47 52.045,45.155 52.045,44.13 52.356,43.819 52.356,42.589 52.475,42.47 IC1.5
PF13: IC2.5 IC2.47 | length 3.8
  Bottom Layer w0.254: IC2.47 52.03,55.191 52.241,54.979 IC2.5
PF14: IC3.5 IC3.47 | length 3.7
  Bottom Layer w0.254: IC3.5 51.758,66.073 52.042,65.789 IC3.47
PF15: IC4.5 IC4.47 | length 3.8
  Top Layer w0.254: IC4.5 50.563,49.606 51.537,49.606 51.754,49.824 IC4.47
TELM2: IC1.40 pad.0.8MM@46.838,47.371 | length 3.1
  Bottom Layer w0.203: pad.0.8MM@46.838,47.371 46.838,47.318 47.363,46.793 47.363,46.632 47.995,45.999 48.26,45.999 48.484,45.775 48.484,45.215 IC1.40
TELM3: IC2.40
TELM4: IC3.40
TELM5: IC4.40
TP: IC1.41
TP3: IC2.41
TP4: IC3.41
TP5: IC4.41
VG2: IC1.2 IC1.22 IC1.46 R21.2 R23.2 R25.2 | length 23
  Layer 2 w0.406: v1(52.045,46.533) 54.459,44.119 54.481,44.119 54.578,44.022 v2(54.63,44.022)
  Bottom Layer w0.203: R25.2 47.612,36.474 47.958,36.82 48.03,36.892 IC1.22 ; R21.2 51.613,47.905 52.045,47.473 52.045,46.558 v1@52.019,46.533 ; IC1.2 54.578,43.97 v2(54.63,44.022)
  Bottom Layer w0.254: IC1.22 48.03,39.78 48.178,39.929 51.388,39.929 51.537,40.078 51.537,45.163 IC1.46 51.53,46.043 v1@52.019,46.533
VG3: IC2.2 IC2.22 IC2.46 R1.2 R3.2 R5.2 | length 26.3
  Layer 1 w0.305: v1(45.974,48.717) 48.637,51.38 48.637,54.171 50.952,56.486 50.952,56.998 ; v2(50.952,60.477) 50.978,60.452 50.952,60.427 50.952,56.998 ; v2(54.661,56.998) 50.952,56.998
  Bottom Layer w0.203: v1(45.974,48.717) 46.04,48.783 46.433,48.783 46.748,49.098 46.775,49.098 46.85,49.174 47.513,49.174 48.03,49.69 IC2.22 ; IC2.2 53.251,56.5 53.808,56.5 54.173,56.865 54.503,56.865 R3.2
  Bottom Layer w0.254: R1.2 51.029,60.35 51.667,60.35 51.816,60.202 51.816,59.055 51.53,58.769 IC2.46
VG4: IC3.2 IC3.22 IC3.46 R18.2 R20.2 R43.2 | length 8.9
  Bottom Layer w0.254: R20.2 49.47,64.1 49.767,64.1 50.238,64.571 IC3.2 IC3.2 ; IC3.46 52.542,61.758 53.646,60.654 54.128,60.654 R18.2 ; IC3.22 56.042,72.45 56.337,72.746 R43.2
VG5: IC4.2 IC4.22 IC4.46 R56.2 R58.2 R60.2 | length 9.3
  Top Layer w0.203: R58.2 49.027,51.816 49.195,51.647 49.195,51.617 49.324,51.489 49.324,51.484 49.693,51.115 IC4.2 ; IC4.46 52.254,54.921 52.68,55.347 R56.2 ; IC4.22 55.8,45.37 55.8,44.442 56.256,43.986 58.046,43.986 R60.2
VM: pad.XT60@56.019,32.816 R32.1 R33.1 U3.3 | length 0.1
  Top Layer w0.254: R32.1@50.855,38.278 R32.1@50.902,38.232
VREG122: C14.2 C15.2 IC1.6 | length 1.5
  Bottom Layer w0.254: IC1.6 53.238,41.978 54.653,41.978 C15.2
  Bottom Layer w0.305: C14.2 C14.2@54.785,43.042
VREG123: C3.2 C4.2 IC2.6 | length 2.7
  Bottom Layer w0.203: IC2.6 54.508,54.479 54.61,54.581 C4.2 54.629,54.655 54.629,55.546 C3.2
VREG124: C11.2 C12.2 IC3.6 | length 2.9
  Bottom Layer w0.254: C11.2 49.327,65.403 C12.2 49.327,66.497 49.403,66.573 IC3.6
VREG125: C30.2 C31.2 IC4.6 | length 2.9
  Top Layer w0.254: C30.2 48.844,49.888 C31.2@48.844,49.039 ; C31.2 C31.2@48.844,49.039 ; IC4.6 48.921,49.115 C31.2@48.844,49.039
pads on no net: IC1.7 IC1.11 IC1.12 IC1.14 IC1.15 IC1.16 IC1.18 IC1.19 IC1.20 IC1.24 IC1.39 IC1.43 IC2.7 IC2.11 IC2.12 IC2.14 IC2.15 IC2.16 IC2.18 IC2.19 IC2.20 IC2.24 IC2.39 IC2.43 IC3.7 IC3.11 IC3.12 IC3.14 IC3.15 IC3.16 IC3.18 IC3.19 IC3.20 IC3.24 IC3.39 IC3.43 IC4.7 IC4.11 IC4.12 IC4.14 IC4.15 IC4.16 IC4.18 IC4.19 IC4.20 IC4.24 IC4.39 IC4.43 J1.1 J1.P1 J1.P2

## Polygon pours and split planes (outlines as drawn)
MOTOR2C on Bottom Layer "GND" (solid, pour order 4): 37.262,31.369 31.394,31.369 30.429,32.334 29.413,32.334 29.413,36.144 29.464,36.195 37.236,36.195 37.262,36.17
MOTOR2B on Bottom Layer "GND" (solid, pour order 2): 37.262,44.679 31.394,44.679 30.429,45.644 29.413,45.644 29.413,49.454 29.464,49.505 37.236,49.505 37.262,49.479
MOTOR2A on Bottom Layer "GND" (solid, pour order 3): 37.236,50.241 31.369,50.241 30.404,51.206 29.388,51.206 29.388,55.016 29.439,55.067 37.211,55.067 37.236,55.042
NetD2_C on Bottom Layer "GND" (solid, pour order 1): 52.807,40.64 52.807,40.31 54.009,40.31 54.162,40.157 55.474,40.157 55.677,39.954 55.677,38.379 56.693,38.379 57.099,38.786 57.099,39.294 57.302,39.497 60.046,39.497 60.122,39.573 60.122,40.538 60.02,40.64 56.49,40.64 56.464,40.615
NetD1_C on Bottom Layer "GND" (solid, pour order 5): 52.785,53.155 52.785,52.825 53.987,52.825 54.14,52.672 55.452,52.672 55.655,52.469 55.655,50.894 56.671,50.894 57.077,51.301 57.077,51.809 57.28,52.012 60.024,52.012 60.1,52.088 60.1,53.053 59.998,53.155 56.468,53.155 56.442,53.129
NetD3_C on Bottom Layer "GND" (solid, pour order 6): 51.283,68.224 50.165,68.224 50.114,68.275 48.158,68.275 47.269,69.164 47.269,70.485 47.498,70.714 47.498,71.323 46.406,71.323 46.38,71.298 46.38,70.485 45.847,69.952 44.45,69.952 44.374,69.875 44.374,68.809 44.45,68.732 47.041,68.732 47.879,67.894 51.283,67.894
GND on Bottom Layer "GND" (solid, pour order 0): 40.538,30.277 63.119,30.277 63.627,30.785 63.627,35.941 40.538,35.941
6S on Top Layer "GND" (solid, pour order 11): 47.803,40.081 44.45,40.081 44.196,39.827 44.196,38.202 44.044,38.049 40.691,38.049 40.462,37.821 40.488,37.795 40.488,30.48 40.843,30.124 46.253,30.124 46.507,30.378 46.507,34.798 47.498,35.789 47.828,35.789
6S on Top Layer "GND" (solid, pour order 10): 57.328,36.5 57.328,40.97 57.937,41.58 57.937,42.393 58.445,42.901 63.576,42.901 63.576,30.175 63.5,30.099 63.5,30.074 59.741,30.074 59.258,30.556 59.258,35.357 58.191,36.424 57.404,36.424
VM on Top Layer "GND" (solid, pour order 9): 49.708,40.869 50.089,41.25 52.705,41.25 53.061,40.894 53.061,40.513 53.213,40.361 56.109,40.361 56.845,39.624 56.845,35.992 58.141,35.992 58.877,35.255 58.877,30.658 58.369,30.15 54.077,30.15 52.426,31.801 52.426,34.595 51.359,35.662 49.936,35.662 49.708,35.89
NetD4_C on Top Layer "GND" (solid, pour order 8): 51.003,47.777 49.378,47.777 48.971,47.371 47.549,47.371 47.142,47.777 45.974,47.777 44.882,48.87 44.882,49.911 44.856,49.936 44.323,49.936 44.272,49.886 44.272,46.761 44.348,46.685 47.803,46.685 48.158,47.041 49.174,47.041 49.581,47.447 51.003,47.447

## Silkscreen, mask and mechanical layers (free items; w line width, h text height)
Top Overlay:
  circle w1.5: c36.769,71.066 r2.926
  circle w1.5: c36.769,40.566 r2.85
  circle w1.5: c67.269,71.066 r2.828
  circle w1.5: c67.269,40.566 r2.915
Mechanical 1:
  circle w0.051: c36.769,40.566 r2
  circle w0.051: c36.769,71.066 r2
  circle w0.051: c67.269,71.066 r2
  circle w0.051: c67.269,40.566 r2